# Altium PCB Tigershark 3D R1.3.PcbDoc (part 1 of 3)
Units mil, origin at the board's own origin, x right, y up, seen from the top; angles counter-clockwise.
Board outline 5500 x 4400 mil, 4 copper layers (Top Layer, Groun Plane, Power Plane, Bottom Layer); 256 components, 241 nets, 971 pads, 851 vias.
Unrouted connection lines stored in the file: 58.
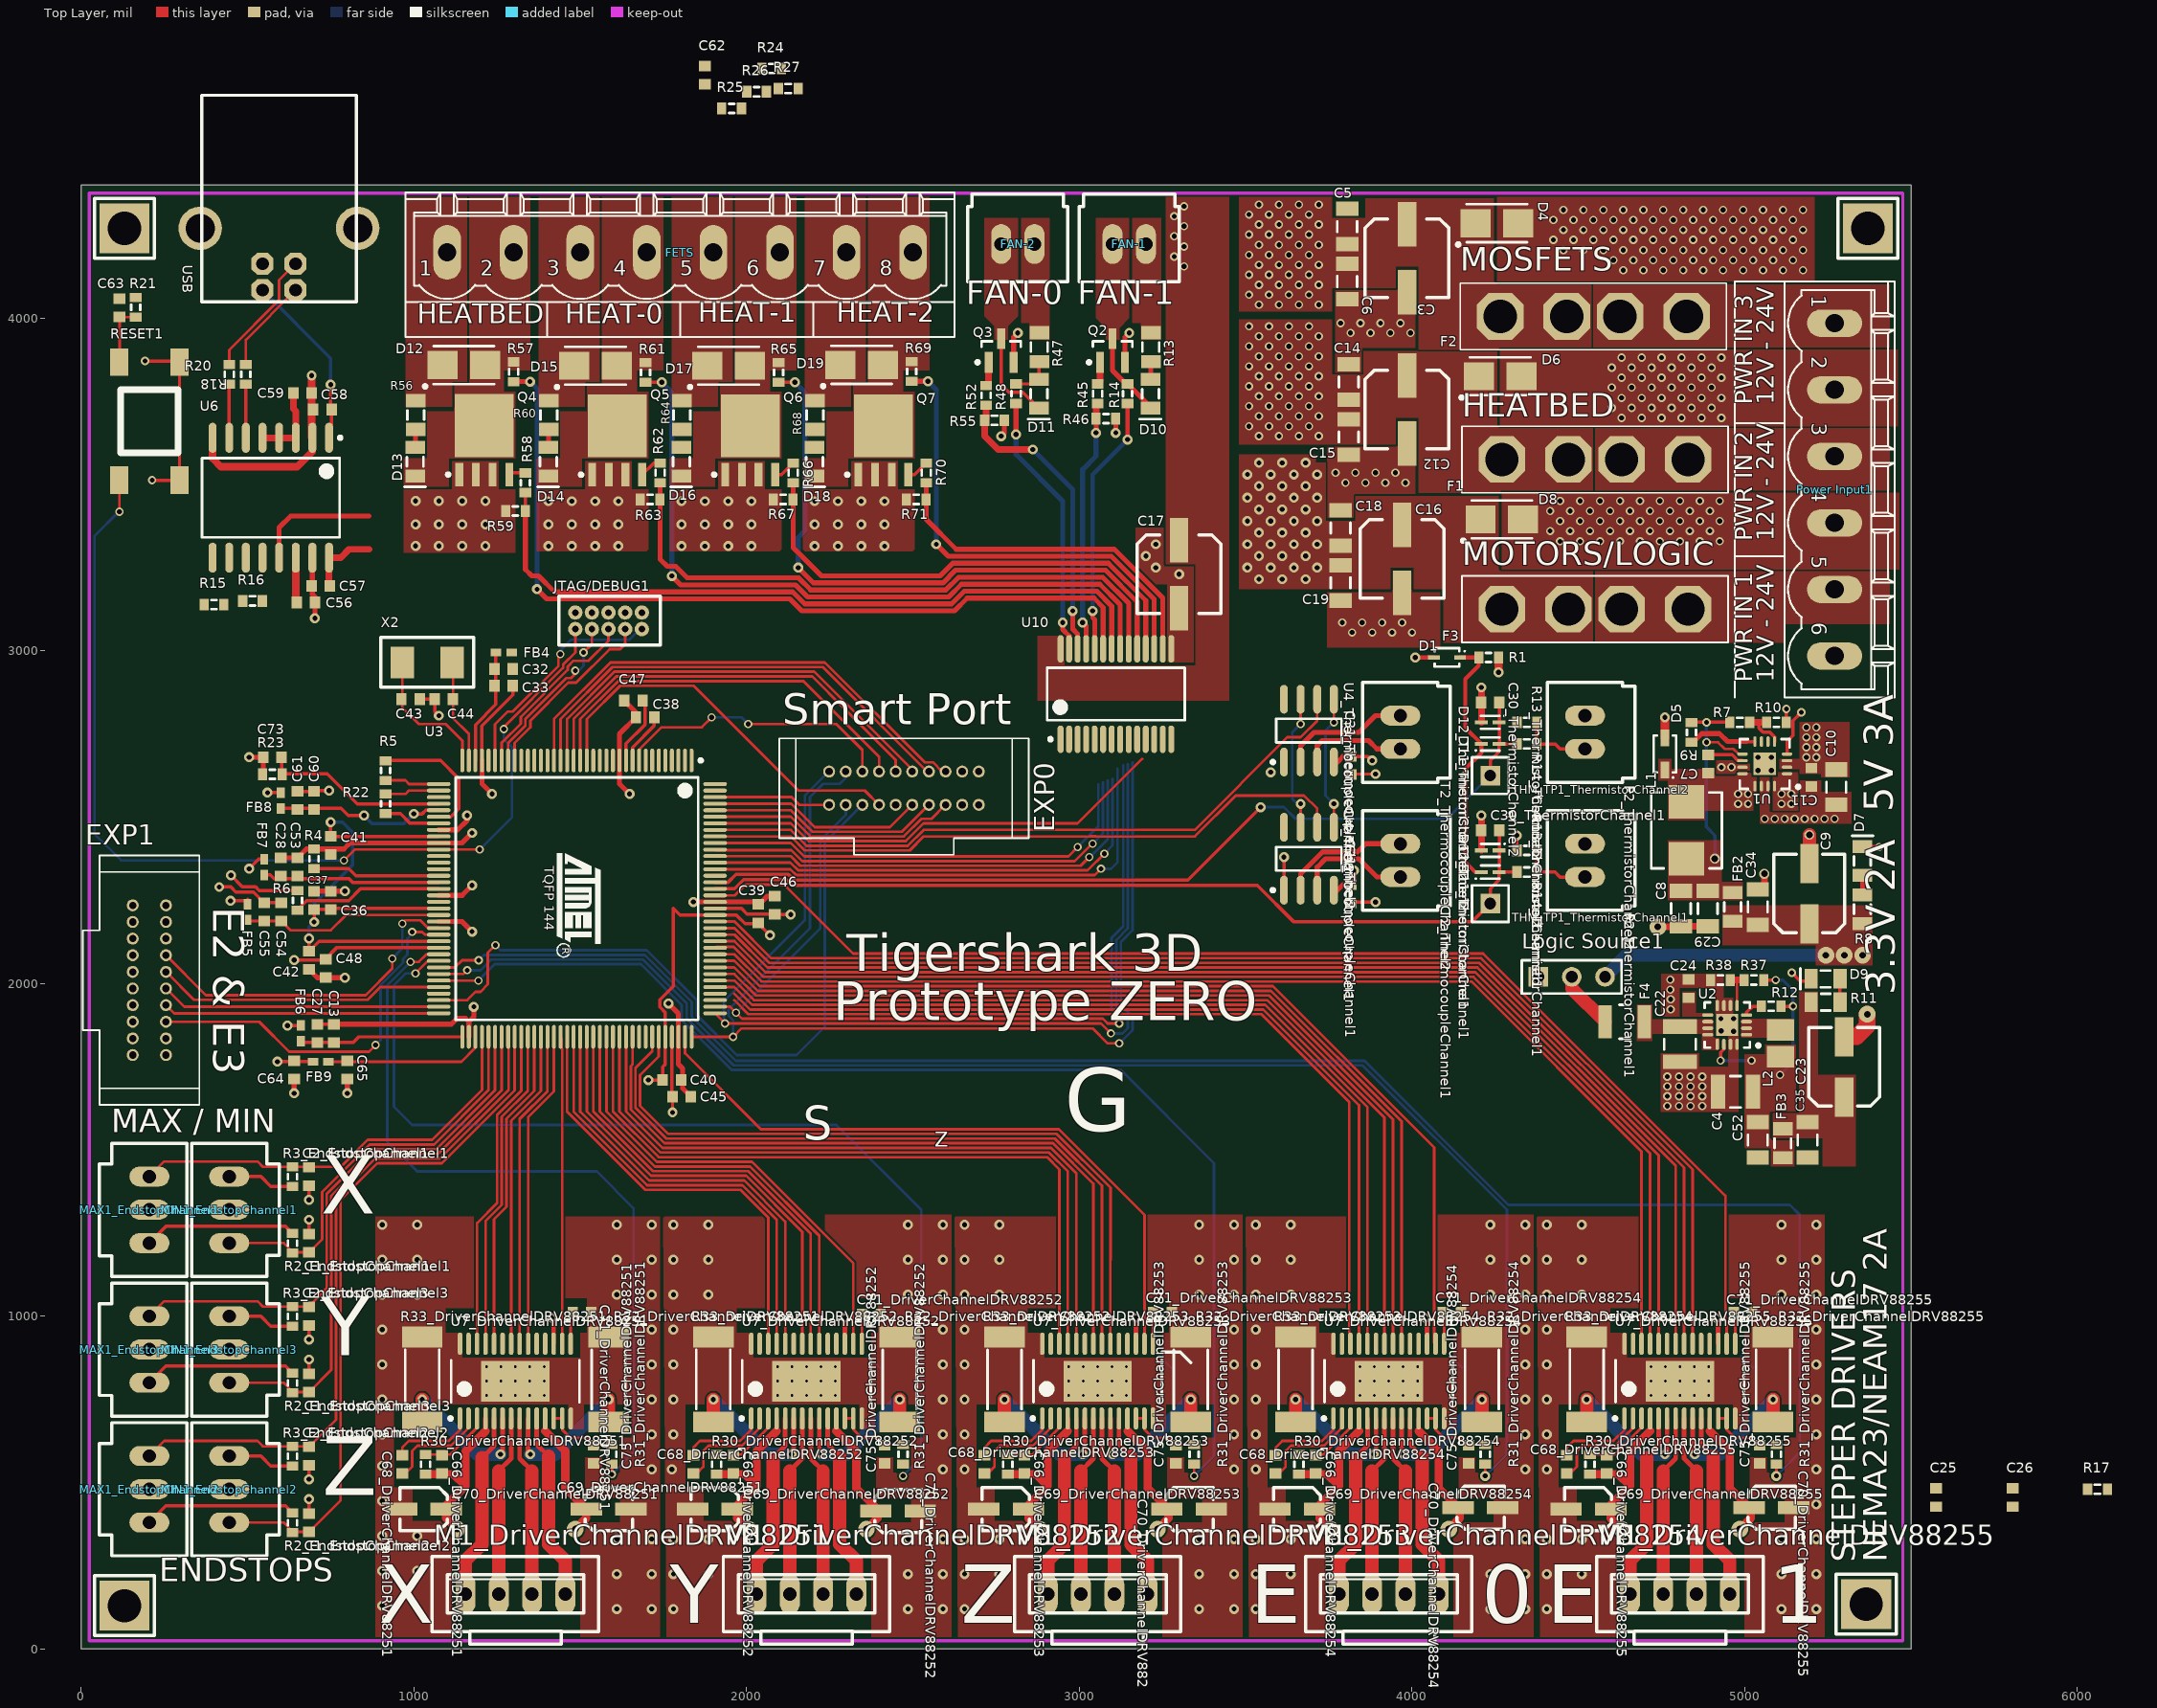
[diagram p0: Top Layer view]
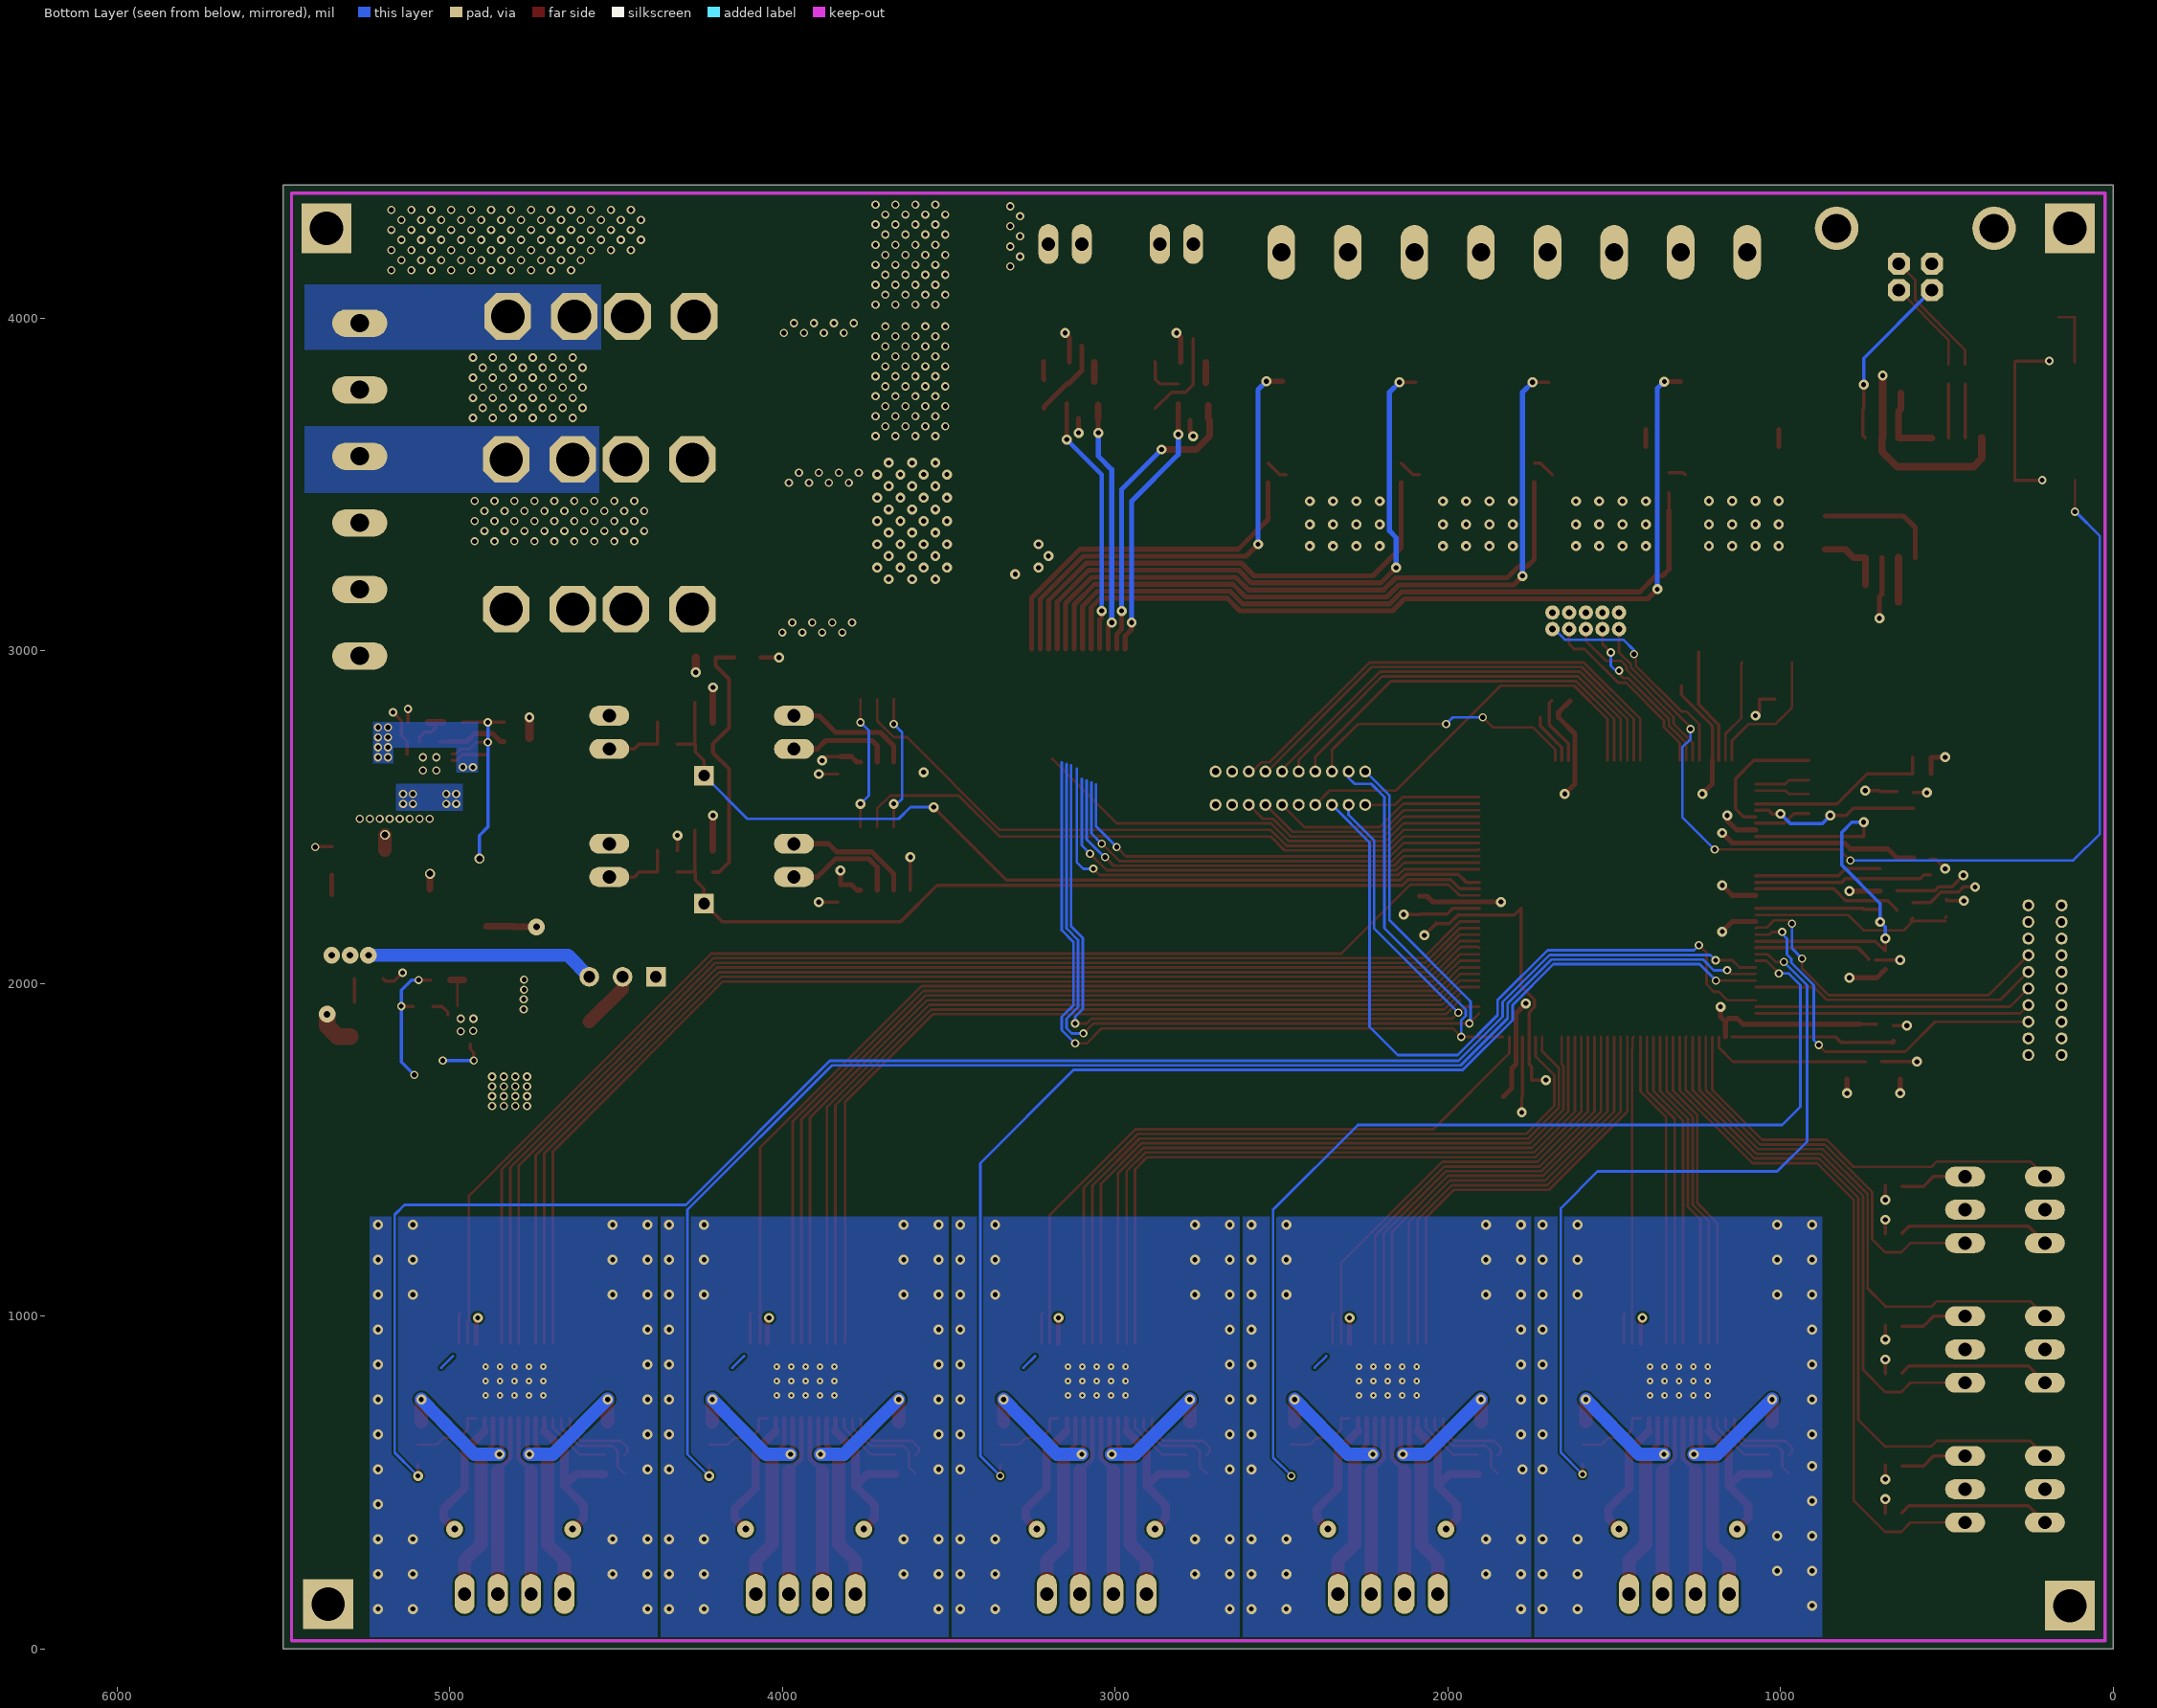
[diagram p1: Bottom Layer view, seen from below]
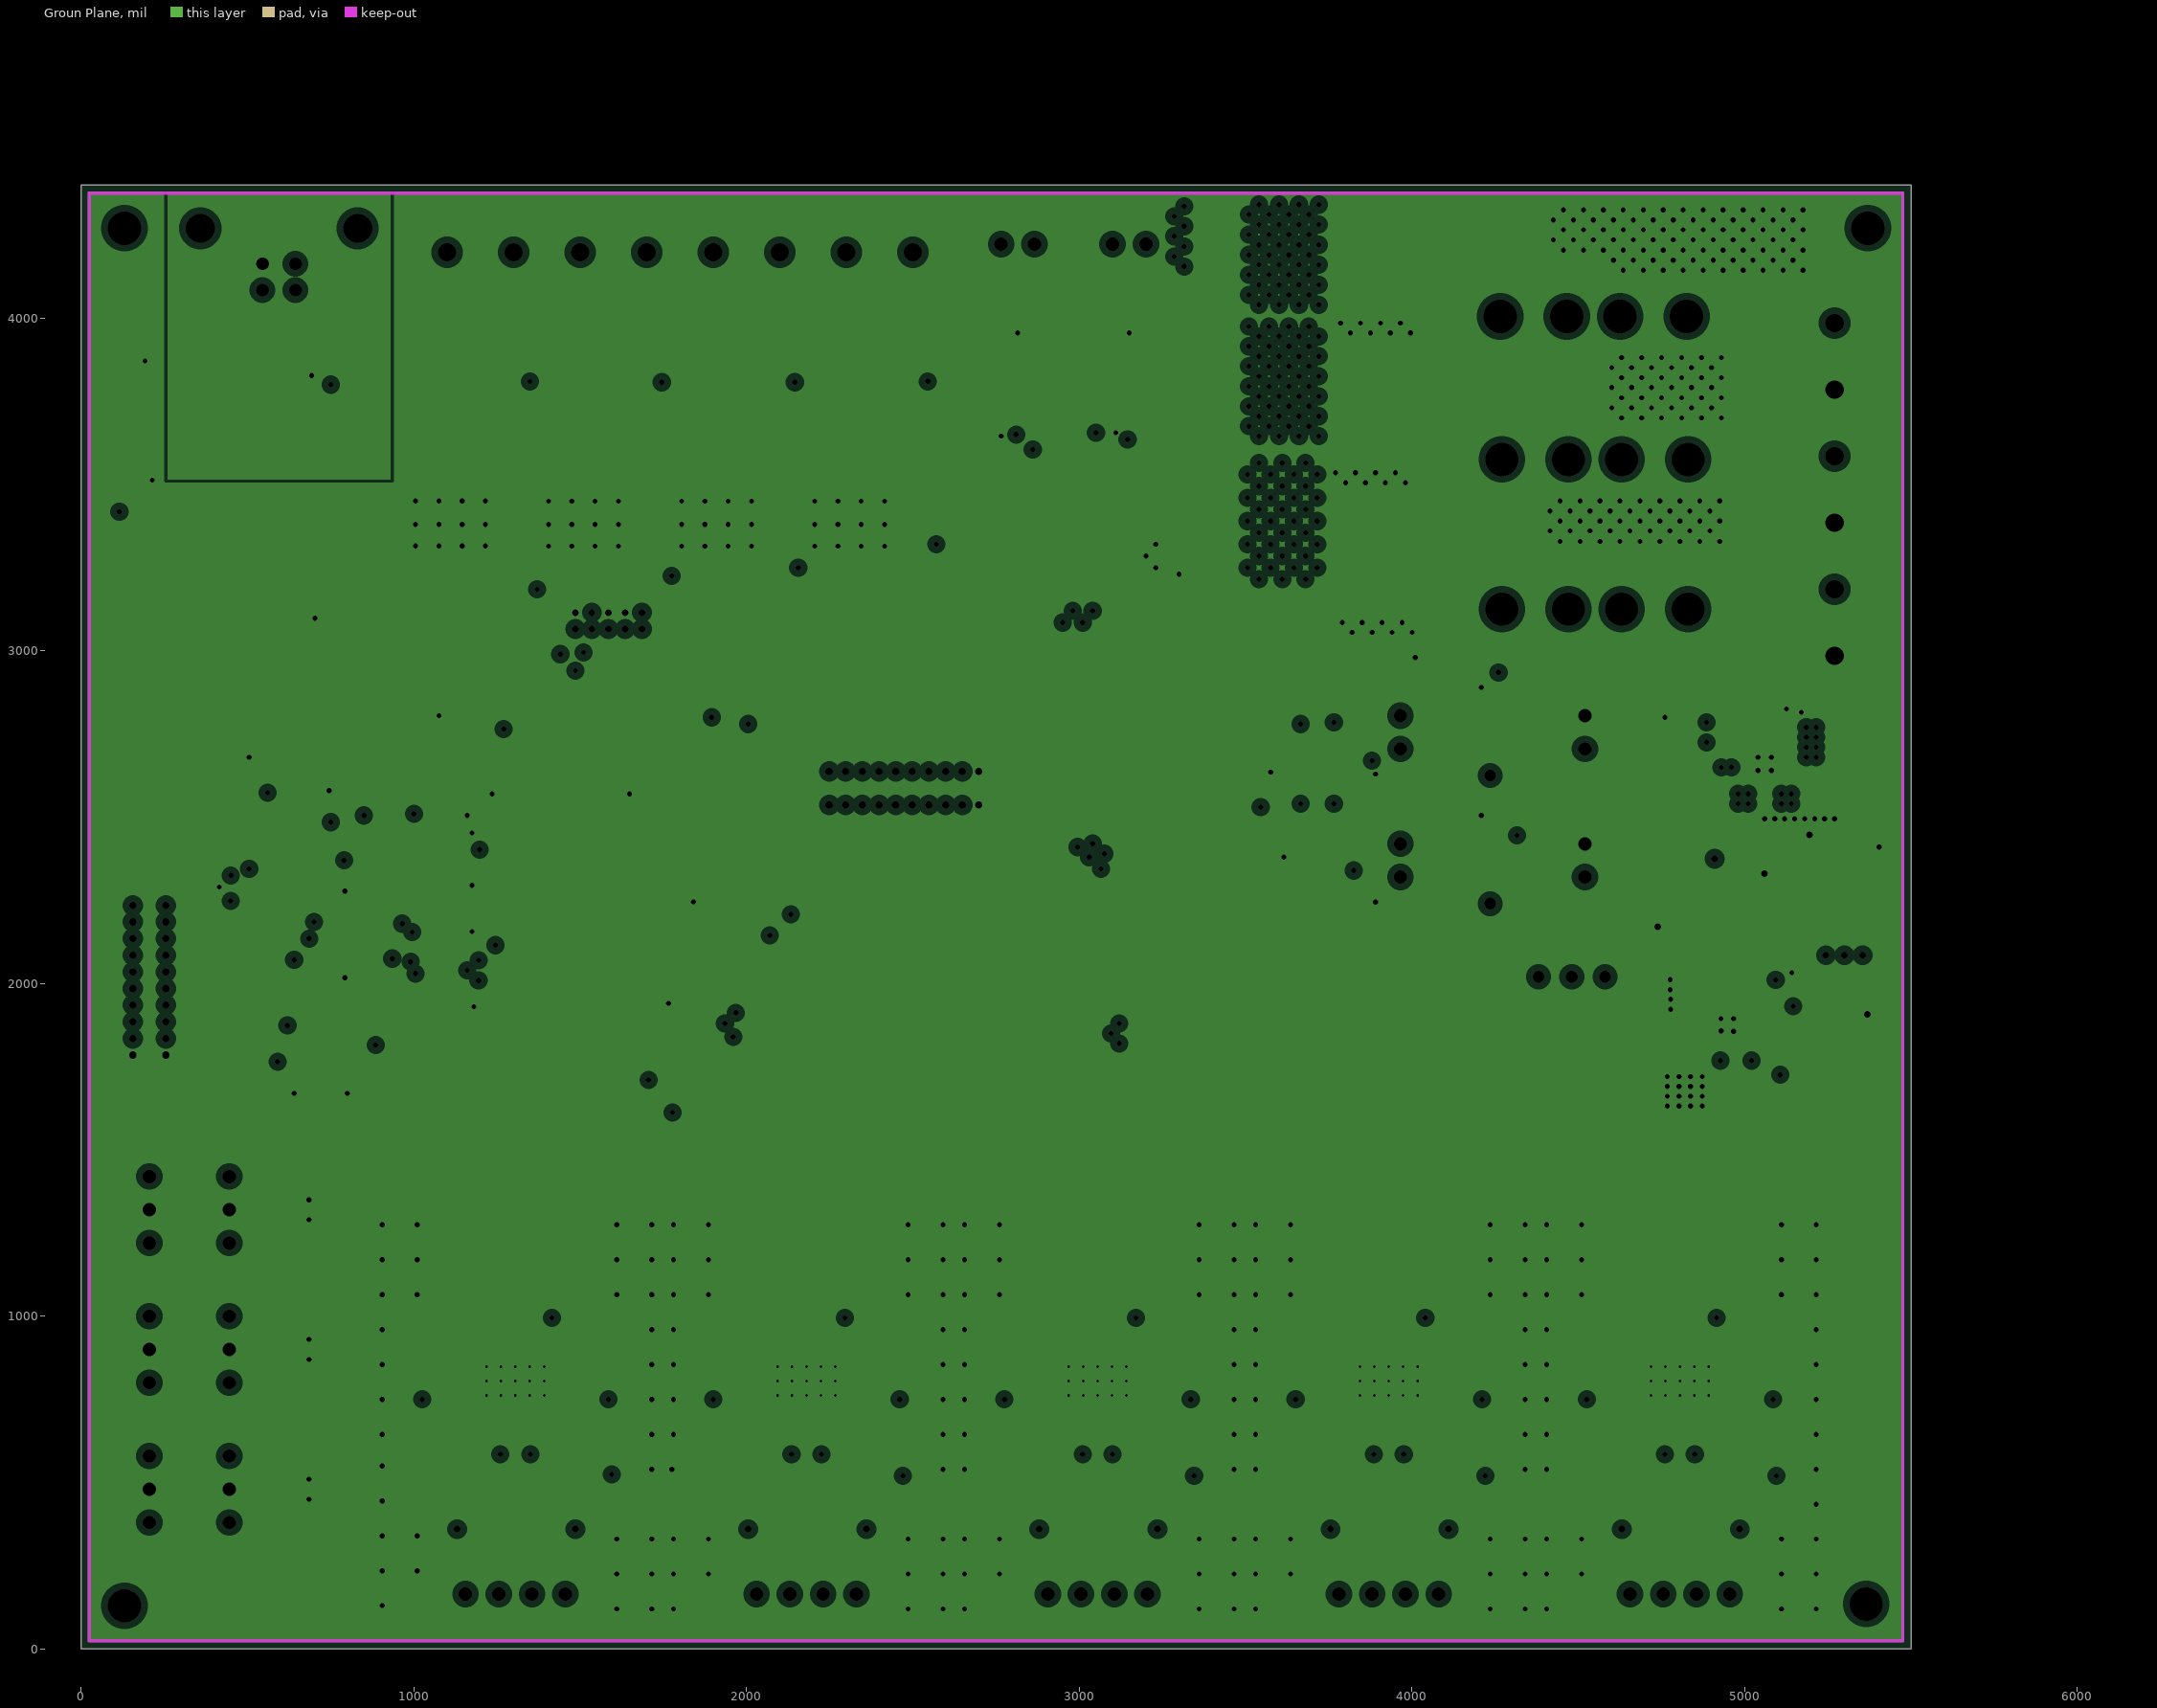
[diagram p2: Groun Plane, clearances drawn from the general rule]
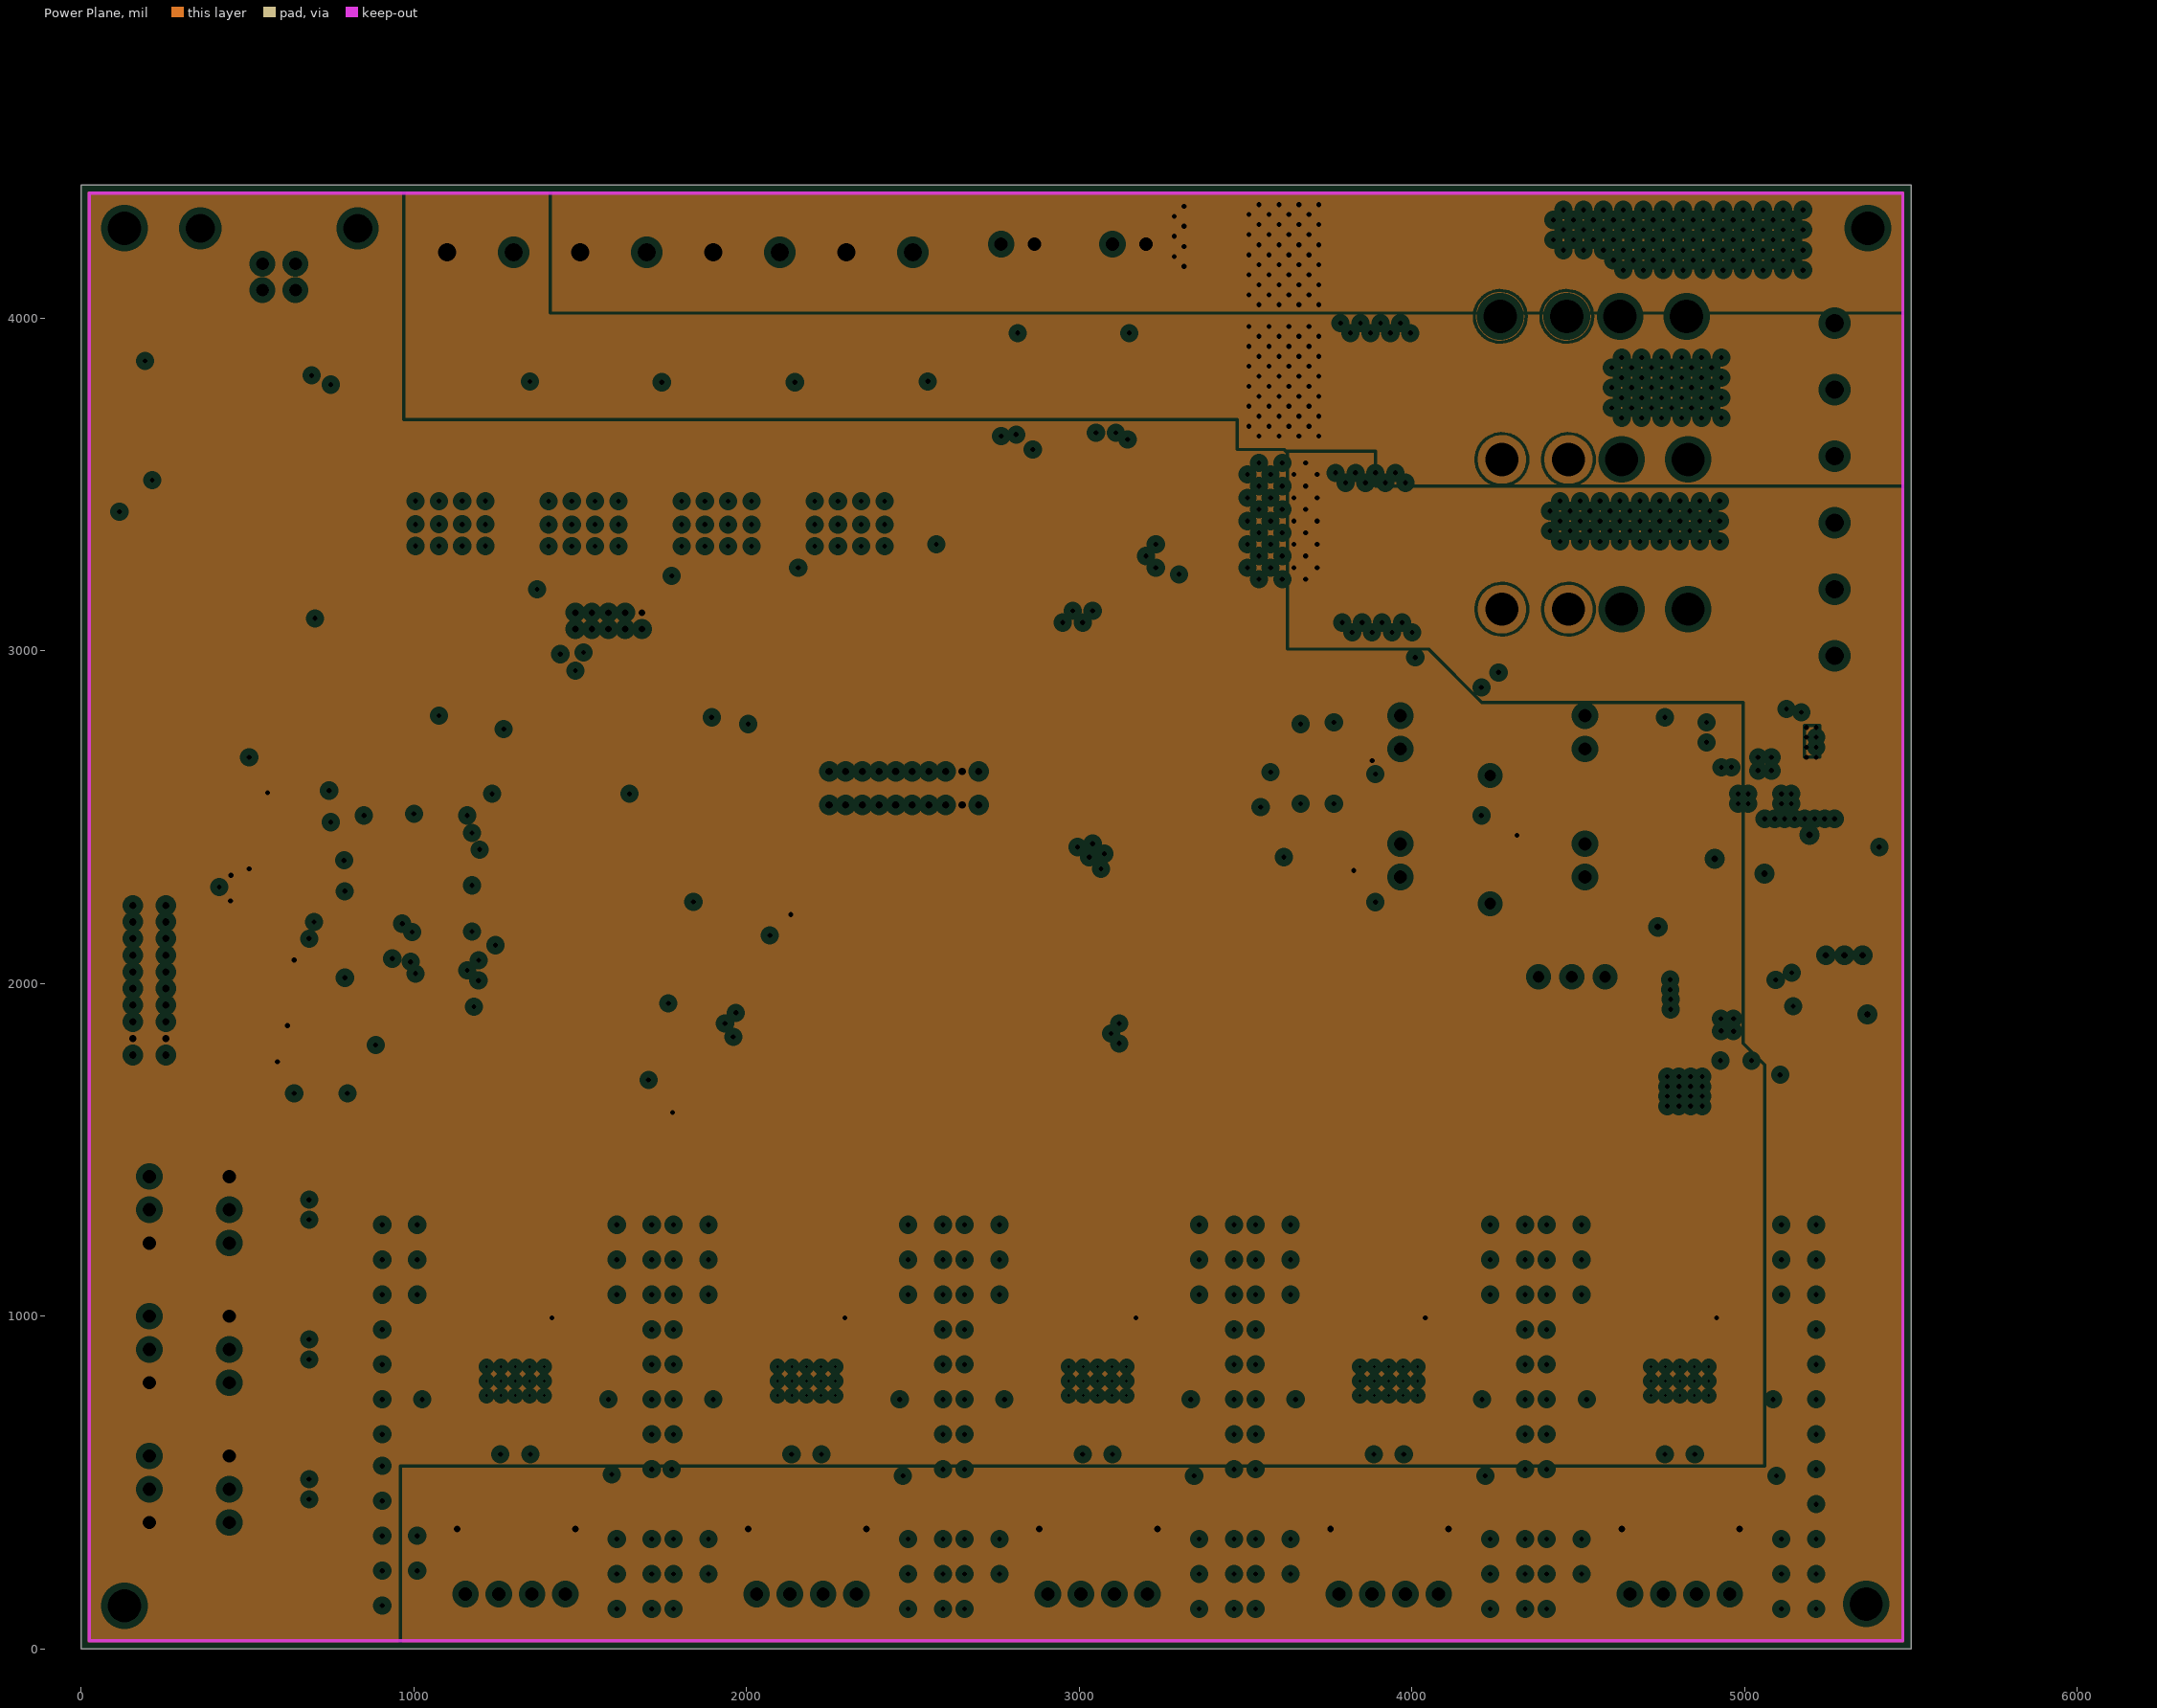
[diagram p3: Power Plane, clearances drawn from the general rule]

## Layer stack, top to bottom
Top Layer: signal copper 1.4
Dielectric: core 12.6, FR-4, Dk 4.8
Groun Plane: plane copper 1.4, net (Multiple Nets)
Dielectric: prepreg 12.6, FR-4, Dk 4.8
Power Plane: plane copper 1.4, net (Multiple Nets)
Dielectric: core 12.6, FR-4, Dk 4.8
Bottom Layer: signal copper 1.4

## Board outline
0,0 5500,0 5500,4400 0,4400

## Design rules (kind name [scope] priority, off if disabled: settings)
Clearance [All] p1: gap=6
ComponentClearance [All] p1: gap=0 collisioncheckmode=3 verticalgap=10 showdistances=FALSE
FanoutControl Fanout_SOIC [(InComponent('U8') AND InComponent('U7'))] p3: bgadir=Out bgaviamode=Centered fanoutstyle=Staggered fanoutdirection=Alternating viagrid=1 // Fanout_SOIC (Default Rule)
FanoutControl Fanout_Small [All] p4: bgadir=Out bgaviamode=Centered fanoutstyle=Auto fanoutdirection=Alternating viagrid=1 // Fanout_Small (Default Rule)
HoleSize [All] p1: absolutevalues=TRUE maxlimit=120 minlimit=1 maxpercent=80.000 minpercent=20.000
MinimumSolderMaskSliver [All] p1 off: minsoldermaskwidth=10
PlaneClearance [All] p1: clearance=20
PlaneConnect [All] p1: planeconnectstyle=Direct reliefexpansion=20 reliefentries=4 reliefconductorwidth=10 reliefairgap=10
PolygonConnect [All] p1: connectstyle=Direct reliefconductorwidth=45 reliefentries=4 polygonreliefangle="90 Angle" airgapwidth=10
RoomDefinition DriverChannelDRV88255 [InComponentClass('DriverChannelDRV88255')] p1: confinementstyle=ConfineIn formatcopy=TRUE lockcomponents=FALSE outline 4375,0 5250,0 5250,1400 4375,1400
RoomDefinition DriverChannelDRV88254 [InComponentClass('DriverChannelDRV88254')] p2: confinementstyle=ConfineIn formatcopy=TRUE lockcomponents=FALSE outline 3500,0 4375,0 4375,1400 3500,1400
RoomDefinition DriverChannelDRV88253 [InComponentClass('DriverChannelDRV88253')] p3: confinementstyle=ConfineIn formatcopy=TRUE lockcomponents=FALSE outline 2625,0 3500,0 3500,1400 2625,1400
RoomDefinition DriverChannelDRV88252 [InComponentClass('DriverChannelDRV88252')] p4: confinementstyle=ConfineIn formatcopy=TRUE lockcomponents=FALSE outline 1750,0 2625,0 2625,1400 1750,1400
RoomDefinition DriverChannelDRV88251 [InComponentClass('DriverChannelDRV88251')] p5: confinementstyle=ConfineIn formatcopy=TRUE lockcomponents=FALSE outline 875,0 1750,0 1750,1400 875,1400
RoutingVias [All] p1: holewidth=15 width=25 viastyle="Through Hole" minholewidth=15 minwidth=25 maxholewidth=28 maxwidth=50
SilkToSilkClearance [All] p1 off: silktosilkclearance=10
SilkToSolderMaskClearance SilkscreenOverComponentPads [IsPad] p1 off: minsilkscreentomaskgap=10 clearancetoexposedcopper=TRUE
SolderMaskExpansion [All] p1: expansion=4
Width [All] p1: maxlimit=200 minlimit=6 preferedwidth=6 minimp=50.000000 maximp=50.000000 favimp=50.000000
19 further rules are at their usual default settings.

## Classes and differential pairs
channel class "Thermistor Channel": ThermistorChannel1 ThermistorChannel2
component class ThermistorChannel2: C30_ThermistorChannel2 D11_ThermistorChannel2 D12_ThermistorChannel2 P2_ThermistorChannel2 R13_ThermistorChannel2 R14_ThermistorChannel2 THM_TP1_ThermistorChannel2
component class ThermistorChannel1: C30_ThermistorChannel1 D11_ThermistorChannel1 D12_ThermistorChannel1 P2_ThermistorChannel1 R13_ThermistorChannel1 R14_ThermistorChannel1 THM_TP1_ThermistorChannel1
net class THERM_ANBUS[1..2]: THERM_AN0
net class TC_CS_BUS[1..2]: TC_CS0
net class SCLK[1..2]: SCLK0 SCLK1 SCLK2
net class MISO[1..2]: MISO0 MISO1 MISO2
net class MIN_ES_BUS[1..3]: MIN_ES0
net class MAX_ES_BUS[1..3]: MAX_ES0
component class Designator: C3 C4 C5 C6 C7 C8 C9 C10 C11 C12 C14 C15 C16 C18 C19 C22 C23 C24 C29 C34 C35 C52 D1 D4 D5 D6 D7 D8 D9 F1 F2 F3 F4 FB2 FB3 L1 L2 "Logic Source1" "Power Input1" R1 R7 R8 R9 R10 R11 R12 R37 R38 U1 U2
component class "ATSAM3X8E Main Controller": C13 C27 C28 C32 C33 C36 C37 C38 C39 C40 C41 C42 C43 C44 C45 C46 C47 C48 C53 C54 C55 C56 C57 C58 C59 C60 C61 C62 C63 C64 C65 C73 EXP0 EXP1 FB4 FB5 FB6 FB7 FB8 FB9 JTAG/DEBUG1 R4 R5 R6 R15 R16 R18 R20 R21 R22 R23 R24 R25 R26 R27 RESET1 U3 U6 USB X2
component class DriverChannelDRV88251: C66_DriverChannelDRV88251 C68_DriverChannelDRV88251 C69_DriverChannelDRV88251 C70_DriverChannelDRV88251 C71_DriverChannelDRV88251 C75_DriverChannelDRV88251 M1_DriverChannelDRV88251 R30_DriverChannelDRV88251 R31_DriverChannelDRV88251 R32_DriverChannelDRV88251 R33_DriverChannelDRV88251 U7_DriverChannelDRV88251
component class DriverChannelDRV88252: C66_DriverChannelDRV88252 C68_DriverChannelDRV88252 C69_DriverChannelDRV88252 C70_DriverChannelDRV88252 C71_DriverChannelDRV88252 C75_DriverChannelDRV88252 M1_DriverChannelDRV88252 R30_DriverChannelDRV88252 R31_DriverChannelDRV88252 R32_DriverChannelDRV88252 R33_DriverChannelDRV88252 U7_DriverChannelDRV88252
component class DriverChannelDRV88253: C66_DriverChannelDRV88253 C68_DriverChannelDRV88253 C69_DriverChannelDRV88253 C70_DriverChannelDRV88253 C71_DriverChannelDRV88253 C75_DriverChannelDRV88253 M1_DriverChannelDRV88253 R30_DriverChannelDRV88253 R31_DriverChannelDRV88253 R32_DriverChannelDRV88253 R33_DriverChannelDRV88253 U7_DriverChannelDRV88253
component class DriverChannelDRV88254: C66_DriverChannelDRV88254 C68_DriverChannelDRV88254 C69_DriverChannelDRV88254 C70_DriverChannelDRV88254 C71_DriverChannelDRV88254 C75_DriverChannelDRV88254 M1_DriverChannelDRV88254 R30_DriverChannelDRV88254 R31_DriverChannelDRV88254 R32_DriverChannelDRV88254 R33_DriverChannelDRV88254 U7_DriverChannelDRV88254
component class DriverChannelDRV88255: C66_DriverChannelDRV88255 C68_DriverChannelDRV88255 C69_DriverChannelDRV88255 C70_DriverChannelDRV88255 C71_DriverChannelDRV88255 C75_DriverChannelDRV88255 M1_DriverChannelDRV88255 R30_DriverChannelDRV88255 R31_DriverChannelDRV88255 R32_DriverChannelDRV88255 R33_DriverChannelDRV88255 U7_DriverChannelDRV88255
component class EndstopChannel1: C1_EndstopChannel1 C2_EndstopChannel1 MAX1_EndstopChannel1 MIN1_EndstopChannel1 R2_EndstopChannel1 R3_EndstopChannel1
component class EndstopChannel2: C1_EndstopChannel2 C2_EndstopChannel2 MAX1_EndstopChannel2 MIN1_EndstopChannel2 R2_EndstopChannel2 R3_EndstopChannel2
component class EndstopChannel3: C1_EndstopChannel3 C2_EndstopChannel3 MAX1_EndstopChannel3 MIN1_EndstopChannel3 R2_EndstopChannel3 R3_EndstopChannel3
component class ThermocoupleChannel1: C31_ThermocoupleChannel1 T2_ThermocoupleChannel1 U4_ThermocoupleChannel1
component class ThermocoupleChannel2: C31_ThermocoupleChannel2 T2_ThermocoupleChannel2 U4_ThermocoupleChannel2
channel class "Driver Channel DRV8825": DriverChannelDRV88251 DriverChannelDRV88252 DriverChannelDRV88253 DriverChannelDRV88254 DriverChannelDRV88255
channel class "Endstop Channel": EndstopChannel1 EndstopChannel2 EndstopChannel3
channel class "Thermocouple Channel": ThermocoupleChannel1 ThermocoupleChannel2
component class "U_MOSFETs and Driver": C17 C25 C26 D10 D11 D12 D13 D14 D15 D16 D17 D18 D19 FAN-1 FAN-2 FETS Q2 Q3 Q4 Q5 Q6 Q7 R13 R14 R17 R45 R46 R47 R48 R52 R55 R56 R57 R58 R59 R60 R61 R62 R63 R64 R65 R66 R67 R68 R69 R70 R71 U10

## Components (designator, comment, footprint, x,y, rotation, side; value= is the part's Value field where it differs from the comment)
C1_EndstopChannel1 "0603" 1608[0603] 685,1219.53 r90 top (schematic designator C1)
C1_EndstopChannel2 "0603" 1608[0603] 685,379.53 r90 top (schematic designator C1)
C1_EndstopChannel3 "0603" 1608[0603] 685,799.53 r90 top (schematic designator C1)
C2_EndstopChannel1 "0603" 1608[0603] 685,1420 r270 top (schematic designator C2)
C2_EndstopChannel2 "0603" 1608[0603] 685,580 r270 top (schematic designator C2)
C2_EndstopChannel3 "0603" 1608[0603] 685,1000 r270 top (schematic designator C2)
C3 "VAS D" "Panasonic VS D" 3985,4180 r90 top
C4 "1210" C1210 4972.18,1674.45 r180 top
C5 "1206" C1206 3805,4275 r270 top
C6 "1206" C1206 3805,4110 r90 top
C7 "Cap Semi" 1608[0603] 4890,2660 r90 top
C8 "Cap Semi" C1206 4808,2225 r90 top
C9 "VS C" "Panasonic VS C" 5079,2390 r270 top
C10 "Cap Semi" C1206 5275,2590 r90 top
C11 "Cap Semi" 1608[0603] 5200,2620 r90 top
C12 "VAS D" "Panasonic VS D" 3985,3725 r90 top
C13 "0603" 1608[0603] 760,1850 r270 top
C14 "1206" C1206 3809.5,3807.64 r270 top
C15 "1206" C1206 3809.5,3642.64 r90 top
C16 "VAS D" "Panasonic VS D" 3970,3276.5 r90 top
C17 "Cap2" "Panasonic VS D" 3300,3230 r90 top
C18 "1206" C1206 3785,3369.14 r270 top
C19 "1206" C1206 3785,3204.14 r90 top
C22 "1210" C1210 4805.18,1817.45 r270 top
C23 "VS C" "Panasonic VS C" 5184,1869.45 r270 top
C24 "0603" 1608[0603] 4831.18,1984.45 r270 top
C25 "0603" 1608[0603] 5575,455 r90 top
C26 "0603" 1608[0603] 5805,455 r90 top
C27 "0603" 1608[0603] 710,1850 r270 top
C28 "0603" 1608[0603] 600,2350 r270 top
C29 "1206" C1206 4889,2225 r270 top
C30_ThermistorChannel1 "Cap Semi" 1608[0603] 4235,2460 r0 top (schematic designator C30)
C30_ThermistorChannel2 "Cap Semi" 1608[0603] 4235,2845 r0 top (schematic designator C30)
C31_ThermocoupleChannel1 "Cap Semi" 1608[0603] 3815,2270 r90 top (schematic designator C31)
C31_ThermocoupleChannel2 "Cap Semi" 1608[0603] 3815,2655 r90 top (schematic designator C31)
C32 "0603" 1608[0603] 1270,2945 r180 top
C33 "0603" 1608[0603] 1270,2895 r180 top
C34 "1206" C1206 5039,2230 r90 top
C35 "1206" C1206 5189,1530 r270 top
C36 "0603" 1608[0603] 750,2250 r270 top
C37 "0603" 1608[0603] 700,2250 r270 top
C38 "0603" 1608[0603] 1695,2800 r0 top
C39 "0603" 1608[0603] 2035,2210 r270 top
C40 "0603" 1608[0603] 1775.43,1710 r180 top
C41 "0603" 1608[0603] 750,2415 r90 top
C42 "0603" 1608[0603] 685,2070 r90 top
C43 "0603" 1608[0603] 990,2855 r180 top
C44 "0603" 1608[0603] 1090,2855 r0 top
C45 "0603" 1608[0603] 1805,1660 r180 top
C46 "0603" 1608[0603] 2085,2235 r270 top
C47 "0603" 1608[0603] 1660,2850 r0 top
C48 "0603" 1608[0603] 735,2045 r90 top
C52 "1206" C1206 5039,1530 r270 top
C53 "0603" 1608[0603] 650,2350 r270 top
C54 "0603" 1608[0603] 601.22,2215 r270 top
C55 "0603" 1608[0603] 550,2215 r270 top
C56 "0603" 1608[0603] 675,3145 r180 top
C57 "0603" 1608[0603] 720,3195 r0 top
C58 "0603" 1608[0603] 725,3725 r0 top
C59 "0603" 1608[0603] 665,3775 r180 top
C60 "0603" 1608[0603] 700,2550 r270 top
C61 "0603" 1608[0603] 650,2550 r270 top
C62 "Cap Semi" 1608[0603] 1875,4730 r270 top
C63 "Cap Semi" 1608[0603] 115,4031 r270 top
C64 "0603" 1608[0603] 640,1740 r90 top
C65 "0603" 1608[0603] 800,1740 r90 top
C66_DriverChannelDRV88251 "0603" 1608[0603] 1085,555 r90 top (schematic designator C66)
C66_DriverChannelDRV88252 "0603" 1608[0603] 1960,555 r90 top (schematic designator C66)
C66_DriverChannelDRV88253 "0603" 1608[0603] 2835,555 r90 top (schematic designator C66)
C66_DriverChannelDRV88254 "0603" 1608[0603] 3710,555 r90 top (schematic designator C66)
C66_DriverChannelDRV88255 "0603" 1608[0603] 4585,555 r90 top (schematic designator C66)
C68_DriverChannelDRV88251 "0603" 1608[0603] 965,555 r270 top (schematic designator C68)
C68_DriverChannelDRV88252 "0603" 1608[0603] 1840,555 r270 top (schematic designator C68)
C68_DriverChannelDRV88253 "0603" 1608[0603] 2715,555 r270 top (schematic designator C68)
C68_DriverChannelDRV88254 "0603" 1608[0603] 3590,555 r270 top (schematic designator C68)
C68_DriverChannelDRV88255 "0603" 1608[0603] 4465,555 r270 top (schematic designator C68)
C69_DriverChannelDRV88251 "VS B" "Panasonic VS B" 1655,485 r180 top (schematic designator C69)
C69_DriverChannelDRV88252 "VS B" "Panasonic VS B" 1835,355 r0 top (schematic designator C69)
C69_DriverChannelDRV88253 "VS B" "Panasonic VS B" 2710,355 r0 top (schematic designator C69)
C69_DriverChannelDRV88254 "VS B" "Panasonic VS B" 3585,355 r0 top (schematic designator C69)
C69_DriverChannelDRV88255 "VS B" "Panasonic VS B" 4460,355 r0 top (schematic designator C69)
C70_DriverChannelDRV88251 "VS B" "Panasonic VS B" 960,355 r0 top (schematic designator C70)
C70_DriverChannelDRV88252 "VS B" "Panasonic VS B" 2525,480 r180 top (schematic designator C70)
C70_DriverChannelDRV88253 "VS B" "Panasonic VS B" 3400,485 r180 top (schematic designator C70)
C70_DriverChannelDRV88254 "VS B" "Panasonic VS B" 4275,490 r180 top (schematic designator C70)
C70_DriverChannelDRV88255 "VS B" "Panasonic VS B" 5150,490 r180 top (schematic designator C70)
C71_DriverChannelDRV88251 "0603" 1608[0603] 1505,1010 r180 top (schematic designator C71)
C71_DriverChannelDRV88252 "0603" 1608[0603] 2375,1005 r180 top (schematic designator C71)
C71_DriverChannelDRV88253 "0603" 1608[0603] 3250,1010 r180 top (schematic designator C71)
C71_DriverChannelDRV88254 "0603" 1608[0603] 4120,1010 r180 top (schematic designator C71)
C71_DriverChannelDRV88255 "0603" 1608[0603] 4995,1010 r180 top (schematic designator C71)
C73 "0603" 1608[0603] 575,2680 r0 top
C75_DriverChannelDRV88251 "0603" 1608[0603] 1540,585 r90 top (schematic designator C75)
C75_DriverChannelDRV88252 "0603" 1608[0603] 2415,585 r90 top (schematic designator C75)
C75_DriverChannelDRV88253 "0603" 1608[0603] 3290,585 r90 top (schematic designator C75)
C75_DriverChannelDRV88254 "0603" 1608[0603] 4170,585 r90 top (schematic designator C75)
C75_DriverChannelDRV88255 "0603" 1608[0603] 5045,585 r90 top (schematic designator C75)
D1 "SZMM3Z4V7T1G" SZMM3Z4V7T1G 4105,2980 r0 top
D4 "SK310A-TP" SK310A-TP 4255,4285 r180 top
D5 "PMEG1030EH_EJ" PMEG1030EH_EJ 4760,2690 r270 top
D6 "SK310A-TP" SK310A-TP 4265,3825 r180 top
D7 "LED2" "SM 0805 polarized" 5397.5,2448.23 r270 top
D8 "SK310A-TP" SK310A-TP 4270,3395 r180 top
D9 "LED2" "SM 0805 polarized" 5163.18,2057.45 r0 top
D10 "LED1" "SM 0805 polarized" 3170,3692.58 r90 top
D11 "LED1" "SM 0805 polarized" 2835,3692.58 r90 top
D11_ThermistorChannel1 "Diode 1N4148" 1N4148WT 4235,2335 r180 top (schematic designator D11)
D11_ThermistorChannel2 "Diode 1N4148" 1N4148WT 4235,2720 r180 top (schematic designator D11)
D12 "B240A-13-F" SK310A-TP 1150,3858.64 r180 top
D12_ThermistorChannel1 "Diode 1N4148" 1N4148WT 4235,2400 r0 top (schematic designator D12)
D12_ThermistorChannel2 "Diode 1N4148" 1N4148WT 4235,2785 r0 top (schematic designator D12)
D13 "LED1" "SM 0805 polarized" 960,3488.64 r90 top
D14 "LED1" "SM 0805 polarized" 1360,3488.64 r90 top
D15 "B240A-13-F" SK310A-TP 1546,3856.64 r180 top
D16 "LED1" "SM 0805 polarized" 1760,3488.64 r90 top
D17 "B240A-13-F" SK310A-TP 1946,3856.64 r180 top
D18 "LED1" "SM 0805 polarized" 2160,3488.64 r90 top
D19 "B240A-13-F" SK310A-TP 2346,3859.28 r180 top
EXP0 "10X2-0.1X0.05" "10X2-0.05X0.1 EXP" 2473,2587 r180 top
EXP1 "10X2-0.1X0.05" "10X2-0.05X0.1 EXP" 205,2010 r90 top
F1 "3522-2" 3522-2 4550,3575 r180 top
F2 "3522-2" 3522-2 4545,4005 r180 top
F3 "3522-2" 3522-2 4550,3125 r180 top
F4 "LittleFuse F1210" F1210_M 4639,1885 r180 top
FAN-1 "Molex 70543-02" 70543-02 3150,4222.58 r180 top
FAN-2 "Molex 70543-02" 70543-02 2815,4222.58 r180 top
FB2 "MH2029-300Y" "SM 0805 - gap trimmed" 4964,2230 r270 top
FB3 "MH2029-300Y" "SM 0805 - gap trimmed" 5114,1520 r90 top
FB4 "BLM15HG601SN1D" BLM18PG121SN1D 1270,2995 r180 top
FB5 "BLM15HG601SN1D" BLM18PG121SN1D 500,2215 r270 top
FB6 "BLM15HG601SN1D" BLM18PG121SN1D 660,1850 r270 top
FB7 "BLM15HG601SN1D" BLM18PG121SN1D 550,2350 r270 top
FB8 "BLM15HG601SN1D" BLM18PG121SN1D 600,2550 r270 top
FB9 "BLM15HG601SN1D" BLM18PG121SN1D 720,1765 r0 top
FETS "con-phoenix-508 - 8" MSTBV4 1800,4197.58 r90 top
JTAG/DEBUG1 "S9015E-05-ND" S9015E-05-ND 1485,3115 r0 top
L1 "Inductor" CIP0530LR3R3 4825,2460 r270 top
L2 "VLS252012T-2R2M1R3" VLS252012T-2R2M1R3 5107.18,1820.45 r270 top
"Logic Source1" "Header 3" HDR1X3 4380,2020 r0 top
M1_DriverChannelDRV88251 "Molex 0705430003" 4POL254 1305,165 r0 top (schematic designator M1)
M1_DriverChannelDRV88252 "Molex 0705430003" 4POL254 2180,165 r0 top (schematic designator M1)
M1_DriverChannelDRV88253 "Molex 0705430003" 4POL254 3055,165 r0 top (schematic designator M1)
M1_DriverChannelDRV88254 "Molex 0705430003" 4POL254 3930,165 r0 top (schematic designator M1)
M1_DriverChannelDRV88255 "Molex 0705430003" 4POL254 4805,165 r0 top (schematic designator M1)
MAX1_EndstopChannel1 "Molex 70543-03" 70543-03 205,1320 r270 top (schematic designator MAX1)
MAX1_EndstopChannel2 "Molex 70543-03" 70543-03 205,480 r270 top (schematic designator MAX1)
MAX1_EndstopChannel3 "Molex 70543-03" 70543-03 205,900 r270 top (schematic designator MAX1)
MIN1_EndstopChannel1 "Molex 70543-03" 70543-03 445,1320 r90 top (schematic designator MIN1)
MIN1_EndstopChannel2 "Molex 70543-03" 70543-03 445,480 r90 top (schematic designator MIN1)
MIN1_EndstopChannel3 "Molex 70543-03" 70543-03 445,900 r90 top (schematic designator MIN1)
P2_ThermistorChannel1 "Molex 70543-02" 70543-02 4520,2370 r90 top (schematic designator P2)
P2_ThermistorChannel2 "Molex 70543-02" 70543-02 4520,2755 r90 top (schematic designator P2)
"Power Input1" "con-phoenix-508" MSTBV6 5270,3984.5 r0 top
Q2 "IRML6346TRPBF" IRLML6346 3100,3902.58 r90 top
Q3 "IRML6346TRPBF" IRLML6346 2765,3902.58 r90 top
Q4 "PSMN7R0-60YS" PSMN7R0-60YS 1211.5,3632.02 r90 top
Q5 "PSMN7R0-60YS" PSMN7R0-60YS 1611,3631.64 r90 top
Q6 "PSMN7R0-60YS" PSMN7R0-60YS 2011,3631.64 r90 top
Q7 "PSMN7R0-60YS" PSMN7R0-60YS 2411,3631.64 r90 top
R1 "Res3" J1-0603 4230,2980 r0 top
R2_EndstopChannel1 "0603" J1-0603 635,1219.53 r270 top (schematic designator R2)
R2_EndstopChannel2 "0603" J1-0603 635,379.53 r270 top (schematic designator R2)
R2_EndstopChannel3 "0603" J1-0603 635,799.53 r270 top (schematic designator R2)
R3_EndstopChannel1 "0603" J1-0603 635,1419.53 r90 top (schematic designator R3)
R3_EndstopChannel2 "0603" J1-0603 635,579.53 r90 top (schematic designator R3)
R3_EndstopChannel3 "0603" J1-0603 635,999.53 r90 top (schematic designator R3)
R4 "0603" J1-0603 700,2375 r90 top
R5 "0603" J1-0603 915,2640 r90 top
R6 "0603" J1-0603 650,2250 r90 top
R7 "Res3" J1-0603 4985,2785 r180 top
R8 "Res3" "SM 0805 - gap trimmed" 5354,2223.23 r270 top
R9 "Res3" J1-0603 4840,2755 r270 top
R10 "Res3" J1-0603 5095,2785 r180 top
R11 "Res3" "SM 0805 - gap trimmed" 5243.18,1943.45 r180 top
R12 "0603" J1-0603 5079.18,1931.45 r0 top
R13 "0805" "SM 0805 - gap trimmed" 3215,3912.58 r270 top
R13_ThermistorChannel1 "Res3" J1-0603 4345,2400 r180 top (schematic designator R13)
R13_ThermistorChannel2 "Res3" J1-0603 4345,2785 r180 top (schematic designator R13)
R14 "0603" J1-0603 3145,3772.58 r90 top
R14_ThermistorChannel1 "Res3" J1-0603 4345,2335 r0 top (schematic designator R14)
R14_ThermistorChannel2 "Res3" J1-0603 4345,2720 r0 top (schematic designator R14)
R15 "0603" J1-0603 399,3139 r180 top
R16 "0603" J1-0603 515,3150 r0 top
R17 "Res3" J1-0603 6060,480 r0 top
R18 "0603" J1-0603 495,3831 r90 top
R20 "0603" J1-0603 445,3831 r90 top
R21 "Res3" J1-0603 164,4032 r90 top
R22 "0603" J1-0603 915,2540 r270 top
R23 "0603" J1-0603 575,2628.78 r0 top
R24 "0603" J1-0603 2075,4750 r180 top
R25 "0603" J1-0603 1955,4630 r0 top
R26 "0603" J1-0603 2030,4680 r180 top
R27 "0603" J1-0603 2125,4690 r180 top
R30_DriverChannelDRV88251 "0603" J1-0603 1035,555 r90 top (schematic designator R30)
R30_DriverChannelDRV88252 "0603" J1-0603 1910,555 r90 top (schematic designator R30)
R30_DriverChannelDRV88253 "0603" J1-0603 2785,555 r90 top (schematic designator R30)
R30_DriverChannelDRV88254 "0603" J1-0603 3660,555 r90 top (schematic designator R30)
R30_DriverChannelDRV88255 "0603" J1-0603 4535,555 r90 top (schematic designator R30)
R31_DriverChannelDRV88251 "0603" J1-0603 1595,585 r270 top (schematic designator R31)
R31_DriverChannelDRV88252 "0603" J1-0603 2470,585 r270 top (schematic designator R31)
R31_DriverChannelDRV88253 "0603" J1-0603 3345,585 r270 top (schematic designator R31)
R31_DriverChannelDRV88254 "0603" J1-0603 4220,585 r270 top (schematic designator R31)
R31_DriverChannelDRV88255 "0603" J1-0603 5095,585 r270 top (schematic designator R31)
R32_DriverChannelDRV88251 "2512" Resistor2512 1585,810 r270 top (schematic designator R32)
R32_DriverChannelDRV88252 "2512" Resistor2512 2460,810 r270 top (schematic designator R32)
R32_DriverChannelDRV88253 "2512" Resistor2512 3335,810 r270 top (schematic designator R32)
R32_DriverChannelDRV88254 "2512" Resistor2512 4210,810 r270 top (schematic designator R32)
R32_DriverChannelDRV88255 "2512" Resistor2512 5085,810 r270 top (schematic designator R32)
R33_DriverChannelDRV88251 "2512" Resistor2512 1025,810 r270 top (schematic designator R33)
R33_DriverChannelDRV88252 "2512" Resistor2512 1900,810 r270 top (schematic designator R33)
R33_DriverChannelDRV88253 "2512" Resistor2512 2775,810 r270 top (schematic designator R33)
R33_DriverChannelDRV88254 "2512" Resistor2512 3650,810 r270 top (schematic designator R33)
R33_DriverChannelDRV88255 "2512" Resistor2512 4525,810 r270 top (schematic designator R33)
R37 "0603" J1-0603 5027.18,2010.45 r0 top
R38 "0603" J1-0603 4927.18,2010.45 r0 top
R45 "0603" J1-0603 3055,3772.58 r90 top
R46 "0603" J1-0603 3080,3697.58 r0 top
R47 "0805" "SM 0805 - gap trimmed" 2880,3912.58 r270 top
R48 "0603" J1-0603 2810,3772.58 r90 top
R52 "0603" J1-0603 2720,3767.58 r90 top
R55 "0603" J1-0603 2745,3692.58 r0 top
R56 "0805" "SM 0805 - gap trimmed" 1005,3708.64 r90 top
R57 "0603" J1-0603 1300,3838.64 r90 top
R58 "0603" J1-0603 1335,3505 r90 top
R59 "0603" J1-0603 1305,3420 r180 top
R60 "0805" "SM 0805 - gap trimmed" 1405,3708.64 r90 top
R61 "0603" J1-0603 1696,3836.64 r90 top
R62 "0603" J1-0603 1740,3535 r90 top
R63 "0603" J1-0603 1710,3455 r180 top
R64 "0805" "SM 0805 - gap trimmed" 1805,3708.64 r90 top
R65 "0603" J1-0603 2096,3836.64 r90 top
R66 "0603" J1-0603 2140,3535 r90 top
R67 "0603" J1-0603 2110,3455 r180 top
R68 "0805" "SM 0805 - gap trimmed" 2205,3708.64 r90 top
R69 "0603" J1-0603 2496,3839.28 r90 top
R70 "0603" J1-0603 2540,3535 r90 top
R71 "0603" J1-0603 2510,3455 r180 top
RESET1 "Tactile Switch" TL3301 205,3690 r0 top
T2_ThermocoupleChannel1 "Molex 70543-02" 70543-02 3965,2370 r90 top (schematic designator T2)
T2_ThermocoupleChannel2 "Molex 70543-02" 70543-02 3965,2755 r90 top (schematic designator T2)
THM_TP1_ThermistorChannel1 "TP4" PIN1 4235,2240 r90 top (schematic designator THM_TP1)
THM_TP1_ThermistorChannel2 "TP4" PIN1 4235,2625 r90 top (schematic designator THM_TP1)
U1 "MIC24085" MIC24085-AYML 5060,2660 r180 top
U2 "TPS62142RGTT" RGT16-1700X1700TP 4947.18,1875.45 r180 top
U3 "ATML-ATSAM3X-LQFP-144" LQFP144_N 1490,2255 r270 top
U4_ThermocoupleChannel1 "MAX31855EASA+" MAXM-S8+4_N 3690,2375 r90 top (schematic designator U4)
U4_ThermocoupleChannel2 "MAX31855EASA+" MAXM-S8+4_N 3690,2760 r90 top (schematic designator U4)
U6 "ADuM4160" ADuM4160 570,3460 r270 top
U7_DriverChannelDRV88251 "DRV8825" DRV8825 1305,805 r90 top (schematic designator U7)
U7_DriverChannelDRV88252 "DRV8825" DRV8825 2180,805 r90 top (schematic designator U7)
U7_DriverChannelDRV88253 "DRV8825" DRV8825 3055,805 r90 top (schematic designator U7)
U7_DriverChannelDRV88254 "DRV8825" DRV8825 3930,805 r90 top (schematic designator U7)
U7_DriverChannelDRV88255 "DRV8825" DRV8825 4805,805 r90 top (schematic designator U7)
U10 "TPIC46L01" SOP65P780X200_HS-29N 3110,2870 r90 top
USB "USB-B" PN61729 595,4270 r180 top
X2 "445C35A12M00000" 445C35A12M00000 965,2965 r0 top

## Footprints (in the part's own frame and the unit in brackets; to place one, negate y for a bottom-side part, rotate by r counter-clockwise, add the part's x,y. Pads: shape width x height; smd on the part's side, far side on the other; paste and mask are expansions set on the pad)
1N4148WT [mm] "Molded Diode, 2-Leads, Body 1.20x0.80mm, IPC Medium Density"
  rect 1x0.3 smd: 1(-0.675,0) 2(0.675,0)
  silkscreen extent -0.7,-0.5 1.15,0.55, body extent -0.65,-0.45 0.65,0.45, height 0.7
4POL254 [mil]
  oval 60x120 hole 40: 1(-150,0) 2(-50,0) 3(50,0) 4(150,0)
  silkscreen extent -250,-150 250,113, body extent -250,-150 250,113, height 454
"10X2-0.05X0.1 EXP" [mil]
  round 36 hole 22: 1(225,50) 2(175,50) 3(125,50) 4(75,50) 5(25,50) 6(-25,50) 7(-75,50) 8(-125,50) 9(-175,50) 10(-225,50) 11(-225,-50) 12(-175,-50) 13(-125,-50) 14(-75,-50) 15(-25,-50) 16(25,-50) 17(75,-50) 18(125,-50) 19(175,-50) 20(225,-50)
  silkscreen extent -375,-150 375,200, body extent -375,-150 375,200, height 591
445C35A12M00000 [mm] "Crystal Oscillator"
  rect 1.8x2.4 smd: 1(0,0) 2(3.8,0)
  silkscreen extent -1.65,-1.91 5.46,1.91, body extent -1.27,-1.52 5.08,1.52, height 1
1608[0603] [mm] "Chip Capacitor, Body 1.6x0.8mm, IPC High Density"
  rect 0.8x0.9 smd: 1(-0.7,0) 2(0.7,0)
  body extent -0.87,-0.48 0.87,0.48, height 1.3
3522-2 [mil] "3522-2"
  oct 140x140 hole 100: 1(-280,0) 1(-80,0) 2(80,0) 2(280,0)
  silkscreen extent -400,-100 400,100, body extent -402,-103 402,103, height 299
70543-02 [mil]
  oval 60x120 hole 40: 1(-50,0) 2(50,0)
  silkscreen extent -150,-150 150,113, body extent -150,-150 150,113, height 450
70543-03 [mil]
  oval 60x120 hole 40: 1(-100,0) 2(0,0) 3(100,0)
  silkscreen extent -200,-150 200,113, body extent -200,-150 200,113, height 450
ADuM4160 [mm] "SOIC, 16-Leads, Body 10.30x7.50mm, Pitch 1.27mm, IPC Medium Density"
  oval 2.3x0.6 smd: 1(-4.575,4.445) 2(-4.575,3.175) 3(-4.575,1.905) 4(-4.575,0.635) 5(-4.575,-0.635) 6(-4.575,-1.905) 7(-4.575,-3.175) 8(-4.575,-4.445) 9(4.575,-4.445) 10(4.575,-3.175) 11(4.575,-1.905) 12(4.575,-0.635) 13(4.575,0.635) 14(4.575,1.905) 15(4.575,3.175) 16(4.575,4.445)
  silkscreen extent -4.7,-5.25 3.03,5.42, body extent -3.8,-5.25 3.8,5.25, height 2.65
BLM18PG121SN1D [mm] "Chip Inductor, 2-Leads, Body 1.0x0.5mm, IPC Medium Density"
  rect 0.8x0.6 smd: 1(-0.6,0) 2(0.6,0)
  body extent -0.52,-0.28 0.53,0.27, height 0.6
C1206 [mm] "Chip Capacitor, Body 3.2x1.6mm, IPC High Density"
  rect 1.1x1.7 smd: 1(-1.35,0) 2(1.35,0)
  silkscreen extent -0.4,-0.75 0.4,0.75, body extent -1.7,-0.9 1.7,0.9, height 1.3
C1210 [mm] "Chip Capacitor, Body 3.2x2.5mm, IPC High Density"
  rect 1.1x2.6 smd: 1(-1.35,0) 2(1.35,0)
  silkscreen extent -0.4,-1.2 0.4,1.2, body extent -1.7,-1.35 1.7,1.35, height 1.3
CIP0530LR3R3 [mm] "Precision Wire Wound Inductor, 2-Leads, Body 5.58x5.30mm, IPC Medium Density"
  rect 2.55x2.7 smd: 1(-2.175,0) 2(2.175,0)
  silkscreen extent -2.9,-2.7 2.9,2.7, body extent -2.88,-2.7 2.88,2.7, height 2.29
DRV8825 [mm] "TSOP, 28-Leads, Body 9.70x4.40mm, Pitch 0.65mm, Thermal Pad 5.22.2x3.10.2mm, IPC Medium Density"
  oval 1.7x0.35 smd: 1(-2.85,4.225) 2(-2.85,3.575) 3(-2.85,2.925) 4(-2.85,2.275) 5(-2.85,1.625) 6(-2.85,0.975) 7(-2.85,0.325) 8(-2.85,-0.325) 9(-2.85,-0.975) 10(-2.85,-1.625) 11(-2.85,-2.275) 12(-2.85,-2.925) 13(-2.85,-3.575) 14(-2.85,-4.225) 15(2.85,-4.225) 16(2.85,-3.575) 17(2.85,-2.925) 18(2.85,-2.275) 19(2.85,-1.625) 20(2.85,-0.975) 21(2.85,-0.325) 22(2.85,0.325) 23(2.85,0.975) 24(2.85,1.625) 25(2.85,2.275) 26(2.85,2.925) 27(2.85,3.575) 28(2.85,4.225)
  rect 3.1x5.22 smd: 29(0,0)
  silkscreen extent -2.97,-4.9 1.6,5.07, body extent -2.25,-4.9 2.25,4.9, height 1.2
F1210_M [mm] "Bournes PTC Fuse"
  rect 1x2.5 smd: 1(-1.5,0) 2(1.5,0)
  silkscreen extent -0.4,-1.3 0.4,1.3, body extent -1.7,-1.35 1.7,1.4, height 0.85
HDR1X3 [mm] "Connector; Header; 3 Position"
  rect 1.5x1.5 hole 0.9: 1(0,0)
  round 1.5 hole 0.9: 2(2.54,0) 3(5.08,0)
  silkscreen extent -1.27,-1.27 6.35,1.27
IRLML6346 [mm] "SOT23, 3-Leads, Body 2.92x2.37mm, Pitch 0.95mm, IPC Medium Density"
  rect 1.6x0.6 smd: 1(-0.9,0.95) 2(-0.9,-0.95) 3(0.9,0)
  silkscreen extent -1.02,-1.5 0.7,1.92, body extent -0.7,-1.52 0.7,1.52, height 1.12
J1-0603 [mm] "Chip Resistor, Body 1.6x0.8mm, IPC High Density"
  rect 0.7x0.9 smd: 1(-0.75,0) 2(0.75,0)
  silkscreen extent -0.2,-0.35 0.2,0.35, body extent -0.85,-0.48 0.85,0.48, height 0.9
LQFP144_N [mm] "Thin QFP, 144-Leads, Body 20x20mm, Pitch 0.5mm, IPC Medium Density"
  oval 1.8x0.3 smd: 1(-10.55,8.75) 2(-10.55,8.25) 3(-10.55,7.75) 4(-10.55,7.25) 5(-10.55,6.75) 6(-10.55,6.25) 7(-10.55,5.75) 8(-10.55,5.25) 9(-10.55,4.75) 10(-10.55,4.25) 11(-10.55,3.75) 12(-10.55,3.25) 13(-10.55,2.75) 14(-10.55,2.25) 15(-10.55,1.75) 16(-10.55,1.25) 17(-10.55,0.75) 18(-10.55,0.25) 19(-10.55,-0.25) 20(-10.55,-0.75) 21(-10.55,-1.25) 22(-10.55,-1.75) 23(-10.55,-2.25) 24(-10.55,-2.75) 25(-10.55,-3.25) 26(-10.55,-3.75) 27(-10.55,-4.25) 28(-10.55,-4.75) 29(-10.55,-5.25) 30(-10.55,-5.75) 31(-10.55,-6.25) 32(-10.55,-6.75) 33(-10.55,-7.25) 34(-10.55,-7.75) 35(-10.55,-8.25) 36(-10.55,-8.75) 73(10.55,-8.75) 74(10.55,-8.25) 75(10.55,-7.75) 76(10.55,-7.25) 77(10.55,-6.75) 78(10.55,-6.25) 79(10.55,-5.75) 80(10.55,-5.25) 81(10.55,-4.75) 82(10.55,-4.25) 83(10.55,-3.75) 84(10.55,-3.25) 85(10.55,-2.75) 86(10.55,-2.25) 87(10.55,-1.75) 88(10.55,-1.25) 89(10.55,-0.75) 90(10.55,-0.25) 91(10.55,0.25) 92(10.55,0.75) 93(10.55,1.25) 94(10.55,1.75) 95(10.55,2.25) 96(10.55,2.75) 97(10.55,3.25) 98(10.55,3.75) 99(10.55,4.25) 100(10.55,4.75) 101(10.55,5.25) 102(10.55,5.75) 103(10.55,6.25) 104(10.55,6.75) 105(10.55,7.25) 106(10.55,7.75) 107(10.55,8.25) 108(10.55,8.75)
  oval 0.3x1.8 smd: 37(-8.75,-10.55) 38(-8.25,-10.55) 39(-7.75,-10.55) 40(-7.25,-10.55) 41(-6.75,-10.55) 42(-6.25,-10.55) 43(-5.75,-10.55) 44(-5.25,-10.55) 45(-4.75,-10.55) 46(-4.25,-10.55) 47(-3.75,-10.55) 48(-3.25,-10.55) 49(-2.75,-10.55) 50(-2.25,-10.55) 51(-1.75,-10.55) 52(-1.25,-10.55) 53(-0.75,-10.55) 54(-0.25,-10.55) 55(0.25,-10.55) 56(0.75,-10.55) 57(1.25,-10.55) 58(1.75,-10.55) 59(2.25,-10.55) 60(2.75,-10.55) 61(3.25,-10.55) 62(3.75,-10.55) 63(4.25,-10.55) 64(4.75,-10.55) 65(5.25,-10.55) 66(5.75,-10.55) 67(6.25,-10.55) 68(6.75,-10.55) 69(7.25,-10.55) 70(7.75,-10.55) 71(8.25,-10.55) 72(8.75,-10.55) 109(8.75,10.55) 110(8.25,10.55) 111(7.75,10.55) 112(7.25,10.55) 113(6.75,10.55) 114(6.25,10.55) 115(5.75,10.55) 116(5.25,10.55) 117(4.75,10.55) 118(4.25,10.55) 119(3.75,10.55) 120(3.25,10.55) 121(2.75,10.55) 122(2.25,10.55) 123(1.75,10.55) 124(1.25,10.55) 125(0.75,10.55) 126(0.25,10.55) 127(-0.25,10.55) 128(-0.75,10.55) 129(-1.25,10.55) 130(-1.75,10.55) 131(-2.25,10.55) 132(-2.75,10.55) 133(-3.25,10.55) 134(-3.75,10.55) 135(-4.25,10.55) 136(-4.75,10.55) 137(-5.25,10.55) 138(-5.75,10.55) 139(-6.25,10.55) 140(-6.75,10.55) 141(-7.25,10.55) 142(-7.75,10.55) 143(-8.25,10.55) 144(-8.75,10.55)
  silkscreen extent -10.67,-9.25 9.25,9.58, body extent -10,-10 10,10, height 1.6
MAXM-S8+4_N [mm] "SOIC, 8-Leads, Body 4.9x3.9mm, Pitch 1.27mm, IPC Medium Density"
  oval 2.2x0.6 smd: 1(-2.4,1.905) 2(-2.4,0.635) 3(-2.4,-0.635) 4(-2.4,-1.905) 5(2.4,-1.905) 6(2.4,-0.635) 7(2.4,0.635) 8(2.4,1.905)
  silkscreen extent -2.52,-2.5 0.9,2.88, body extent -2,-2.5 2,2.5, height 1.75
MIC24085-AYML [mm] "QFN, 16-Leads, Body 3.25x3.25mm, Pitch 0.50mm, Thermal Pad 1.73x1.73mm, IPC Medium Density"
  oval 0.8x0.25 smd: 1(-1.7,0.75) 2(-1.7,0.25) 3(-1.7,-0.25) 4(-1.7,-0.75) 9(1.7,-0.75) 10(1.7,-0.25) 11(1.7,0.25) 12(1.7,0.75)
  oval 0.25x0.8 smd: 5(-0.75,-1.7) 6(-0.25,-1.7) 7(0.25,-1.7) 8(0.75,-1.7) 13(0.75,1.7) 14(0.25,1.7) 15(-0.25,1.7) 16(-0.75,1.7)
  rect 1.73x1.73 smd: 17(0,0)
  silkscreen extent -2.68,-1.9 1.9,1.9, body extent -1.75,-1.75 1.75,1.75, height 0.85
MSTBV4 [mil]
  oval 165x82.5 hole 55: 1(0,700) 2(0,500) 3(0,300) 4(0,100) 5(0,-100) 6(0,-300) 7(0,-500) 8(0,-700)
  silkscreen extent -150,-825 180,825, body extent -150,-825 180,825, height 472
MSTBV6 [mil]
  oval 165x82.5 hole 55: 1(0,0) 2(0,-200) 3(0,-400) 4(0,-600) 5(0,-800) 6(0,-1000)
  silkscreen extent -150,-1125 180,125, body extent -150,-1125 180,125, height 472
"Panasonic VS B" [mm]
  rect 2.4x1 smd: 1(3.478,1.651) 2(0.078,1.651)
  silkscreen extent -0.05,0 3.55,3.3
"Panasonic VS C" [mm]
  rect 3x1.4 smd: 1(5.348,2.921) 2(0.748,2.921)
  silkscreen extent 0.05,0.22 6.05,5.62, body extent 0.1,0.29 6,5.59, height 5.41
"Panasonic VS D" [mm]
  rect 3.4x1.4 smd: 1(2.6,0) 2(-2.6,0)
  silkscreen extent -3,-3.2 3,3.2, body extent -3.5,-3.3 3.5,3.3, height 5.4
PIN1 [mm] "Connector; Plug"
  rect 1.5x1.5 hole 0.9: 1(0,0)
  silkscreen extent -1.4,-1.4 1.4,2.17
PMEG1030EH_EJ [mm] "Molded Diode, 2-Leads, Body 2.60x1.60mm, IPC Medium Density"
  rect 1.3x0.65 smd: 1(-1.225,0) 2(1.225,0)
  silkscreen extent -1.4,-0.85 1.85,0.85, body extent -1.35,-0.85 1.35,0.85, height 1.2
PN61729 [mil]
  oct 66x66 hole 38: 1(50,186) 2(-49.21,186) 3(-49.21,107) 4(50,107)
  round 130.5 hole 87: P$1(-236.22,0) P$2(237,0)
  silkscreen extent -232,-400 233,221, body extent -237,-405 238,226, height 406
PSMN7R0-60YS [mm] "TO, 5-Pads, Body 5.15x5.86mm (max), IPC Medium Density"
  rect 1.8x0.6 smd: 1(-2.6,1.905) 2(-2.6,0.635) 3(-2.6,-0.635) 4(-2.6,-1.905)
  rect 4.8x4.5 smd: 5(1.14,0)
  silkscreen extent -2.72,2.63 -2.48,2.88, body extent -1.85,-2.5 2.25,2.5, height 1.2
Resistor2512 [mm]
  rect 1.6x3.1 smd: 1(-3.25,0) 2(3.25,0)
  silkscreen extent -2.26,-1.3 2.26,1.3, body extent -3.24,-1.4 3.24,1.4, height 0.9
RGT16-1700X1700TP [mm] "QFN, 16-Leads, Body 3x3mm, Pitch 0.5mm, Thermal Pad 1.7x1.7mm, TI Recommended"
  oval 0.85x0.28 smd paste-0.025 mask+0.07: 1(-1.475,0.75) 2(-1.475,0.25) 3(-1.475,-0.25) 4(-1.475,-0.75) 9(1.475,-0.75) 10(1.475,-0.25) 11(1.475,0.25) 12(1.475,0.75)
  oval 0.28x0.85 smd paste-0.025 mask+0.07: 5(-0.75,-1.475) 6(-0.25,-1.475) 7(0.25,-1.475) 8(0.75,-1.475) 13(0.75,1.475) 14(0.25,1.475) 15(-0.25,1.475) 16(-0.75,1.475)
  rect 1.7x1.7 smd paste-0.85 mask+0.07: 17(0,0)
  silkscreen extent -2.5,-1.73 1.73,1.73, body extent -1.57,-1.57 1.58,1.58, height 1
S9015E-05-ND [mm] "10 Pin Cortex JTAG Debug Header"
  round 1.1 hole 0.508: 1(5.08,0) 2(5.08,-1.27) 3(3.81,0) 4(3.81,-1.27) 5(2.54,0) 6(2.54,-1.27) 7(1.27,0) 8(1.27,-1.27) 9(0,0) 10(0,-1.27)
  round 0.5 on Top Overlay: 1(7,0.8)
  silkscreen extent -1.25,-2.5 6.5,1.25
SK310A-TP [mm] "Molded Diode, 2-Leads, Body 4.31x2.69mm, IPC Medium Density"
  rect 2.3x2.15 smd: 1(-1.625,0) 2(1.625,0)
  silkscreen extent -2.3,-1.45 3.07,1.75, body extent -2.29,-1.42 2.28,1.42, height 2.95
"SM 0805 - gap trimmed" [mm]
  rect 1x1.5 smd: 1(-1.1,0) 2(1.1,0)
  silkscreen extent -0.36,-0.64 0.35,0.63
"SM 0805 polarized" [mm]
  rect 1x1.5 smd: 1(0.93,-1.105) 2(3.13,-1.105)
  silkscreen extent 0.1,-1.9 2.38,-0.3
SOP65P780X200_HS-29N [mm] "SOP, 28-Leads, Body 10.20x5.30mm, Pitch 0.65mm, Thermal Pad 5.08.2x3.00.2mm, IPC Medium Density"
  oval 2.1x0.45 smd: 1(-3.45,4.225) 2(-3.45,3.575) 3(-3.45,2.925) 4(-3.45,2.275) 5(-3.45,1.625) 6(-3.45,0.975) 7(-3.45,0.325) 8(-3.45,-0.325) 9(-3.45,-0.975) 10(-3.45,-1.625) 11(-3.45,-2.275) 12(-3.45,-2.925) 13(-3.45,-3.575) 14(-3.45,-4.225) 15(3.45,-4.225) 16(3.45,-3.575) 17(3.45,-2.925) 18(3.45,-2.275) 19(3.45,-1.625) 20(3.45,-0.975) 21(3.45,-0.325) 22(3.45,0.325) 23(3.45,0.975) 24(3.45,1.625) 25(3.45,2.275) 26(3.45,2.925) 27(3.45,3.575) 28(3.45,4.225)
  silkscreen extent -3.57,-5.25 2,5.25, body extent -2.8,-5.25 2.8,5.25, height 2
SZMM3Z4V7T1G [mm] "Molded Diode, 2-Leads, Body 1.70x1.25mm, IPC Medium Density"
  rect 0.9x0.35 smd: 1(-1,0) 2(1,0)
  silkscreen extent -0.95,-0.7 1.4,0.7, body extent -0.9,-0.67 0.9,0.67, height 1
TL3301 [mm]
  rect 1.4x2.1 smd: 1(-2.3,-4.5) 1(-2.3,4.5) 2(2.3,-4.5) 2(2.3,4.5)
  silkscreen extent -2.2,-2.4 2.2,2.4
VLS252012T-2R2M1R3 [mm] "Precision Wire Wound Inductor, 2-Leads, Body 2.5x2.0mm, IPC Medium Density"
  rect 1.65x2.1 smd: 1(-1.025,0) 2(1.025,0)
  body extent -1.3,-1.05 1.3,1.05, height 1.2

## Part data
C1_EndstopChannel1 C1_EndstopChannel2 C1_EndstopChannel3 C2_EndstopChannel1 C2_EndstopChannel2 C2_EndstopChannel3 C4 C5 C6 C9 C13 C14 C15 C18 C19 C22 C23 C24 C25 C26 C27 C28 C29 C32 C33 C34 C35 C36 C37 C38 C39 C40 C41 C42 C43 C44 C45 C46 C47 C48 C52 C53 C54 C55 C56 C57 C58 C59 C60 C61 C64 C65 C66_DriverChannelDRV88251 C66_DriverChannelDRV88252 C66_DriverChannelDRV88253 C66_DriverChannelDRV88254 C66_DriverChannelDRV88255 C68_DriverChannelDRV88251 C68_DriverChannelDRV88252 C68_DriverChannelDRV88253 C68_DriverChannelDRV88254 C68_DriverChannelDRV88255 C71_DriverChannelDRV88251 C71_DriverChannelDRV88252 C71_DriverChannelDRV88253 C71_DriverChannelDRV88254 C71_DriverChannelDRV88255 C73 C75_DriverChannelDRV88251 C75_DriverChannelDRV88252 C75_DriverChannelDRV88253 C75_DriverChannelDRV88254 C75_DriverChannelDRV88255: library part "Cap Semi", "Capacitor (Semiconductor SIM Model)"
C3 C12 C16 C69_DriverChannelDRV88251 C69_DriverChannelDRV88252 C69_DriverChannelDRV88253 C69_DriverChannelDRV88254 C69_DriverChannelDRV88255 C70_DriverChannelDRV88251 C70_DriverChannelDRV88252 C70_DriverChannelDRV88253 C70_DriverChannelDRV88254 C70_DriverChannelDRV88255: library part "Cap Pol1", "Polarized Capacitor (Radial)"
C7 C8 C10 C11 C30_ThermistorChannel1 C30_ThermistorChannel2 C31_ThermocoupleChannel1 C31_ThermocoupleChannel2 C62 C63: "Capacitor (Semiconductor SIM Model)"
C17: "Capacitor"
D1: library part "D Zener", "Zener Diode"
D4 D6 D8 D12 D15 D17 D19: library part "D Schottky", "Schottky Diode"
D5: "Default Diode"
D7 D9: "Typical RED, GREEN, YELLOW, AMBER GaAs LED"
D10 D11 D13 D14 D16 D18: "Typical RED GaAs LED"
D11_ThermistorChannel1 D11_ThermistorChannel2 D12_ThermistorChannel1 D12_ThermistorChannel2: "High Conductance Fast Diode"
F1 F2 F3 F4: library part "Fuse 1", "Fuse"
FB2 FB3 L2: library part Inductor, "Inductor"
FETS: library part con-phoenix-508
"Logic Source1": "Header, 3-Pin"
M1_DriverChannelDRV88251 M1_DriverChannelDRV88252 M1_DriverChannelDRV88253 M1_DriverChannelDRV88254 M1_DriverChannelDRV88255: library part "Molex 0705430003 Alt", "Molex 4 Pin Clip Connector"
MAX1_EndstopChannel1 MAX1_EndstopChannel2 MAX1_EndstopChannel3 MIN1_EndstopChannel1 MIN1_EndstopChannel2 MIN1_EndstopChannel3: library part "Molex Endstop"
Q2 Q3 Q4 Q5 Q6 Q7: "N-Channel MOSFET"
R1 R7 R8 R9 R10 R11 R13_ThermistorChannel1 R13_ThermistorChannel2 R14_ThermistorChannel1 R14_ThermistorChannel2 R17 R21: "Resistor"
R2_EndstopChannel1 R2_EndstopChannel2 R2_EndstopChannel3 R3_EndstopChannel1 R3_EndstopChannel2 R3_EndstopChannel3 R4 R5 R6 R12 R13 R14 R15 R16 R18 R20 R22 R23 R24 R25 R26 R27 R30_DriverChannelDRV88251 R30_DriverChannelDRV88252 R30_DriverChannelDRV88253 R30_DriverChannelDRV88254 R30_DriverChannelDRV88255 R31_DriverChannelDRV88251 R31_DriverChannelDRV88252 R31_DriverChannelDRV88253 R31_DriverChannelDRV88254 R31_DriverChannelDRV88255 R32_DriverChannelDRV88251 R32_DriverChannelDRV88252 R32_DriverChannelDRV88253 R32_DriverChannelDRV88254 R32_DriverChannelDRV88255 R33_DriverChannelDRV88251 R33_DriverChannelDRV88252 R33_DriverChannelDRV88253 R33_DriverChannelDRV88254 R33_DriverChannelDRV88255 R37 R38 R45 R46 R47 R48 R52 R55 R56 R57 R58 R59 R60 R61 R62 R63 R64 R65 R66 R67 R68 R69 R70 R71: library part Res3, "Resistor"
THM_TP1_ThermistorChannel1 THM_TP1_ThermistorChannel2: library part Socket, "Socket"
U2: "Buck Step Down Regulator with 3 to 17 V Input and 3.3 V Output, -40 to 85 degC, 16-Pin QFN (RGT), Green (RoHS & no Sb/Br)"
U4_ThermocoupleChannel1 U4_ThermocoupleChannel2: "Cold Junction Compensated Thermocouple to Digital Converter, 14 Bits Temperature Resolution, -40 to 125 degC, 8-Pin SOIC (S8+4), Pb-Free"
U6: "USB Opto Isolator"
U7_DriverChannelDRV88251 U7_DriverChannelDRV88252 U7_DriverChannelDRV88253 U7_DriverChannelDRV88254 U7_DriverChannelDRV88255: "DRV8825 Ti Stepper Driver"
U10: library part TPIC46IO1
X2: library part XTAL, "Crystal Oscillator"

## Free pads (board coordinates)
  rect 150x150 hole 100: ""(130,130) ""(130,4270) ""(5365,135) ""(5370,4270)

## Via types
v1: diameter 25, hole 15, Top Layer to Bottom Layer, 397 vias
v2: diameter 30, hole 15, Top Layer to Bottom Layer, 361 vias
v3: diameter 19.68, hole 7.87, Top Layer to Bottom Layer, 75 vias
v4: diameter 50, hole 20, Top Layer to Bottom Layer, 15 vias
v5: diameter 30, hole 20, Top Layer to Bottom Layer, 3 vias

## Nets (pads, with @x,y where several pads share a name; then routed paths per layer and width w, separated by ;. In a path a pad name is that pad's centre, name@x,y a point inside that pad or via, vN(x,y) a via of type N, cw(c..) or ccw(c..) an arc to the next point about the centre after c; other vN are vias at no path point)
3.3VCC: C23.1 C25.2 C26.1 C31_ThermocoupleChannel1.2 C31_ThermocoupleChannel2.2 C35.1 C45.2 C46.2 C47.2 C48.2 C62.2 C64.2 EXP0.9 EXP0.12 EXP1.9 EXP1.12 FB3.2 FB5.1 FB6.1 FB7.1 FB8.1 FB9.1 JTAG/DEBUG1.1@1685,3115 MAX1_EndstopChannel1.3 MAX1_EndstopChannel2.3 MAX1_EndstopChannel3.3 MIN1_EndstopChannel1.3 MIN1_EndstopChannel2.3 MIN1_EndstopChannel3.3 R2_EndstopChannel1.1 R2_EndstopChannel2.1 R2_EndstopChannel3.1 R3_EndstopChannel1.1 R3_EndstopChannel2.1 R3_EndstopChannel3.1 R6.2 R11.2 R13_ThermistorChannel1.2 R13_ThermistorChannel2.2 R17.1 R21.2 R24.2 R25.2 R26.2 R27.2 U3.11 U3.62 U3.105 U3.125 U4_ThermocoupleChannel1.4 U4_ThermocoupleChannel2.4 U7_DriverChannelDRV88251.17 U7_DriverChannelDRV88252.17 U7_DriverChannelDRV88253.17 U7_DriverChannelDRV88254.17 U7_DriverChannelDRV88255.17 U10.14 | length 4281.4
  Top Layer w10: MAX1_EndstopChannel2.3@205,380 255,430 614.06,430 R2_EndstopChannel2.1@635,409.05 ; MAX1_EndstopChannel3.3@205,800 255,850 614.06,850 R2_EndstopChannel3.1@635,829.05 ; MAX1_EndstopChannel1.3@205,1220 255,1270 614.06,1270 R2_EndstopChannel1.1@635,1249.05 ; MIN1_EndstopChannel2.3@445,580 540,580 570,550 R3_EndstopChannel2.1@635,550 ; MIN1_EndstopChannel3.3@445,1000 540,1000 570,970 R3_EndstopChannel3.1@635,970 ; MIN1_EndstopChannel1.3@445,1420 540,1420 570,1390 R3_EndstopChannel1.1@635,1390 ; v2(449,2248.62) 501.22,2248.62 FB5.1@501.22,2252.8 ; v2(450,2325) 484,2291 524.19,2291 535.66,2279.53 R6.2@650,2279.53 ; v2(505,2345) 533.62,2373.62 FB7.1@550,2373.62 ; v2(560,2573.62) FB8.1@600,2573.62 ; v2(590,1765) FB9.1@696.38,1765 ; v2(620,1873.62) FB6.1@660,1873.62 ; v2(640,2070.81) 715,2070.81 ; C48.2@735,2072.56 735,2075 767.36,2107.36 U3.62@1074.65,2107.36 ; U3.11@1637.64,2670.35 1637.64,2721.18 1694.19,2777.73 1694.19,2843.37 C47.2@1687.56,2850 ; C45.2@1775.43,1660 U3.105@1775.43,1839.65 ; v2(1777.44,1612.56) C45.2@1777.44,1660 ; U3.125@1905.35,2225.47 1984.53,2225.47 2000.81,2209.19 2083.25,2209.19 C46.2@2085,2207.44 v2(2132.44,2207.44) ; C31_ThermocoupleChannel2.2@3830,2682.05 3867.95,2682.05 v2(3880,2670) ; v2(4315,2445) 4315,2400.47 R13_ThermistorChannel1.2@4315.47,2400
  Top Layer w14: v2(1415,995) 1420,995 U7_DriverChannelDRV88251.17@1420,917.36 ; U7_DriverChannelDRV88252.17@2295,917.36 v2(2295,995) ; U7_DriverChannelDRV88253.17@3170,917.36 v2(3170,995) ; v2(4040,995) 4045,995 U7_DriverChannelDRV88254.17@4045,917.36 ; v2(4915,995) 4920,995 U7_DriverChannelDRV88255.17@4920,917.36
  Top Layer w15: U4_ThermocoupleChannel1.4@3765,2280.51 3776.02,2280.51 3792.56,2297.05 3825,2297.05 v2(3825,2339.49) ; U4_ThermocoupleChannel2.4@3765,2665.51 3776.02,2665.51 3792.56,2682.05 C31_ThermocoupleChannel2.2@3825,2682.05
+5VCC: "Logic Source1.3" C9.1 C34.1 FB2.2 R8.2 | length 690.9
  Bottom Layer w40: 4580,2020 4645,2085 v4(5244,2085)
  other v4: 5299,2085 5354,2085